# Altium PCB wacky_hat_pcb.PcbDoc
Units mm, origin at the board's own origin, x right, y up, seen from the top; angles counter-clockwise.
Board outline 64 x 85 mm, 4 copper layers (Top Side, Ground Plane, Power Plane, Bottom Side), stack 0.844 mm thick; 87 components, 73 nets, 324 pads, 67 vias.
Unrouted connection lines stored in the file: 66.
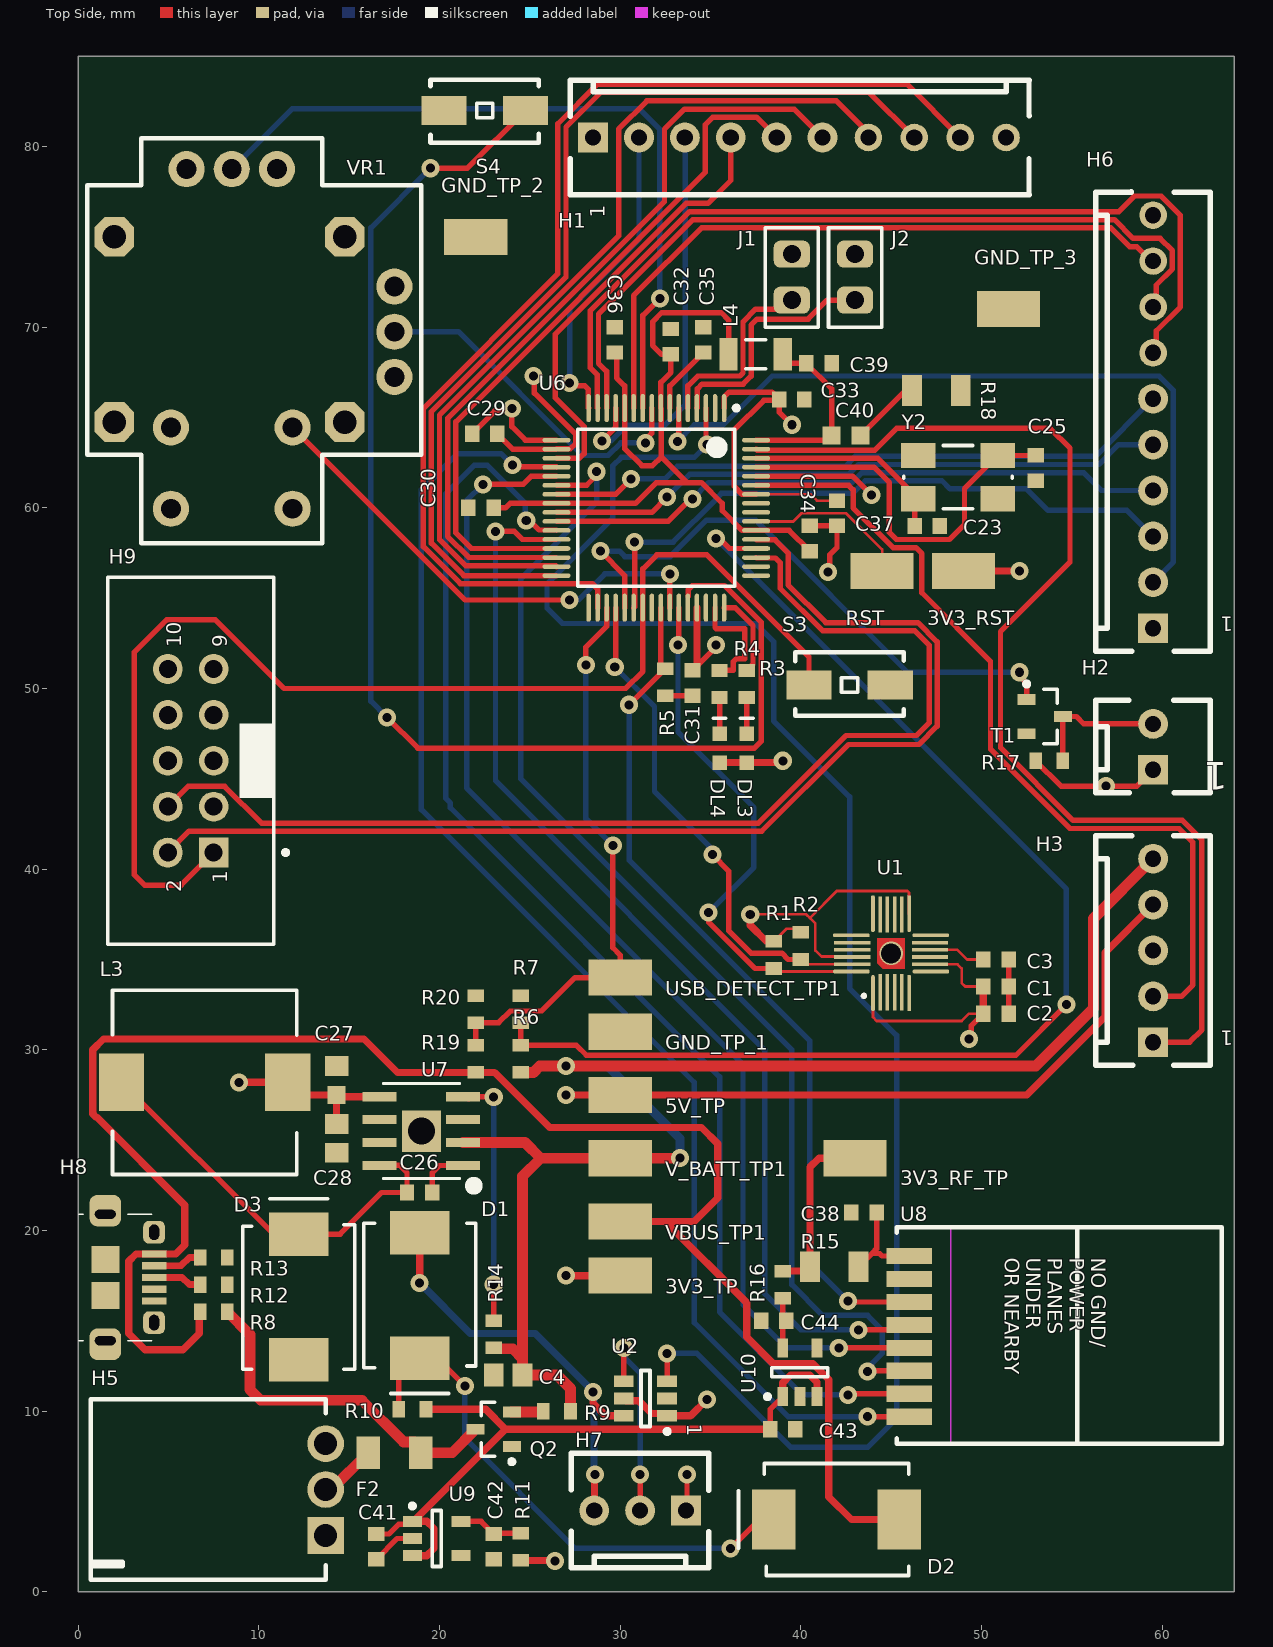
[diagram p0: Top Side view]
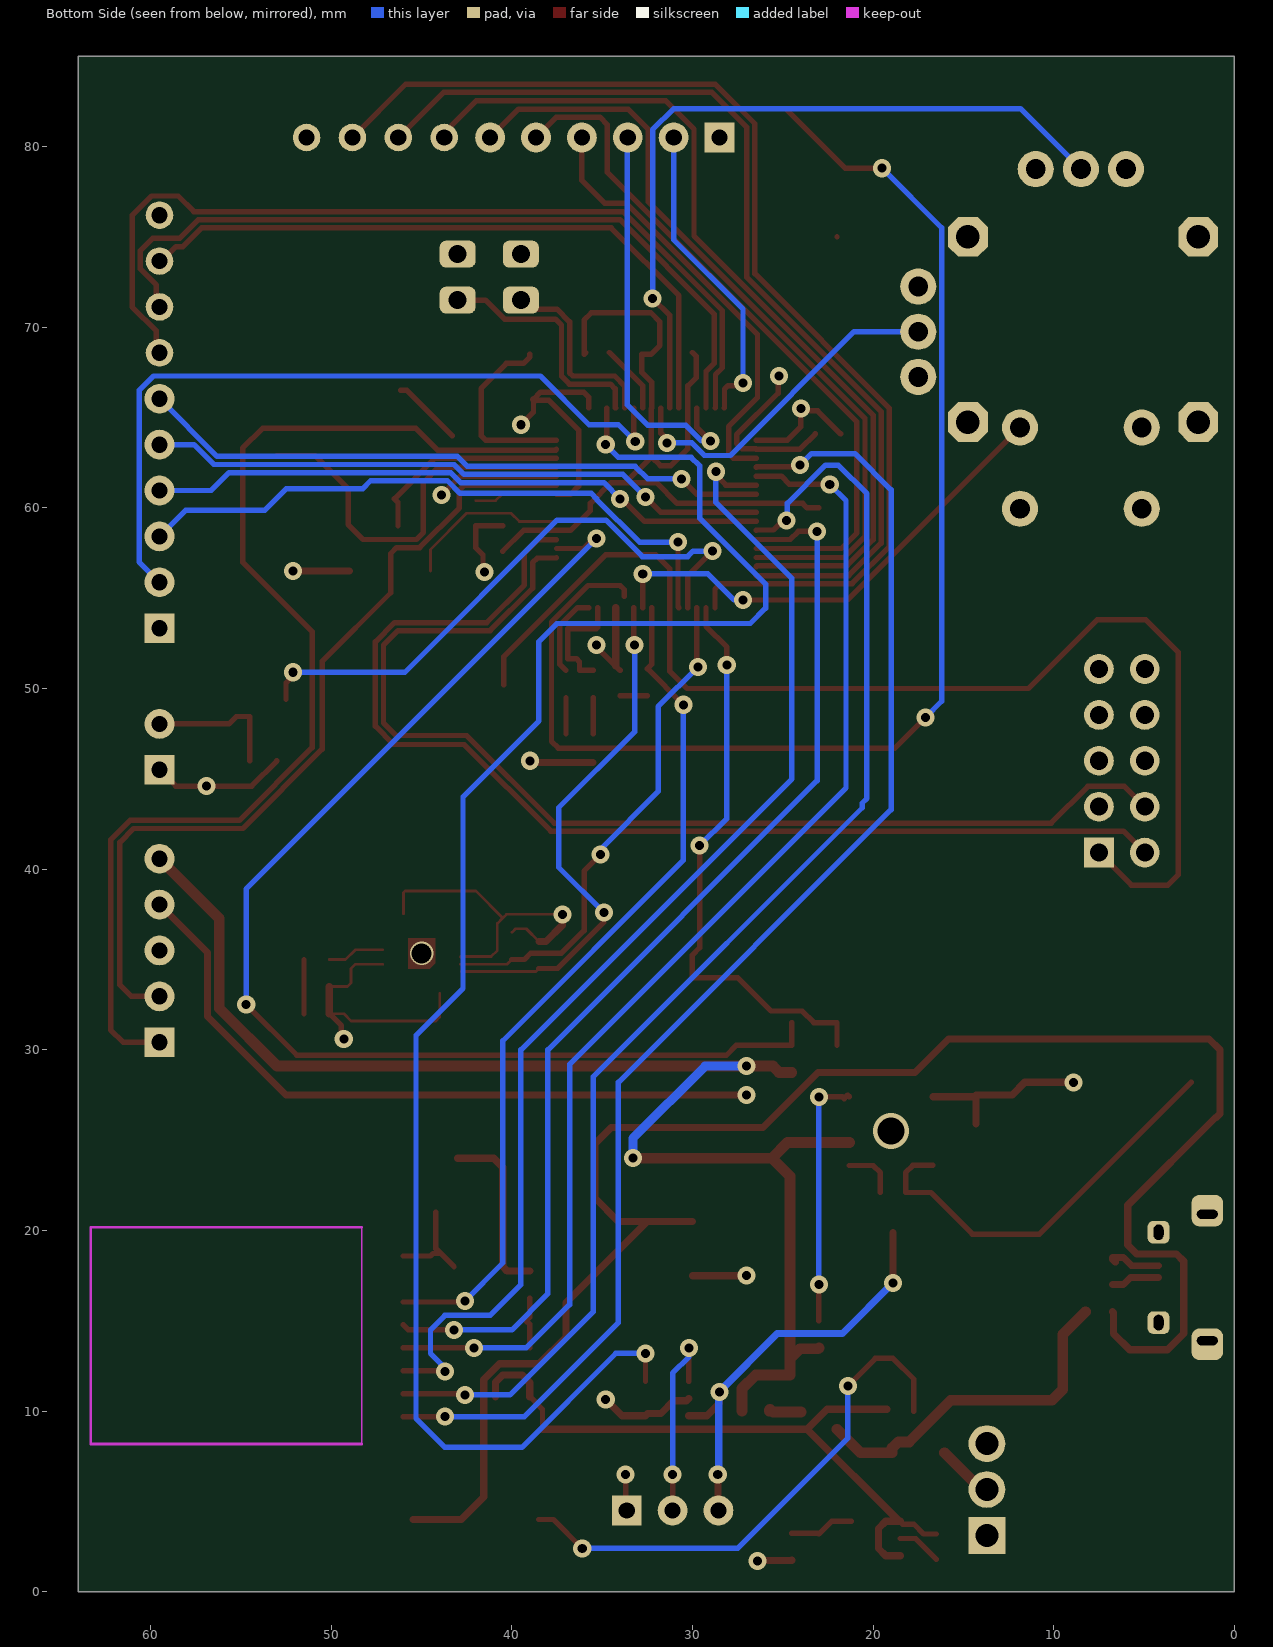
[diagram p1: Bottom Side view, seen from below]
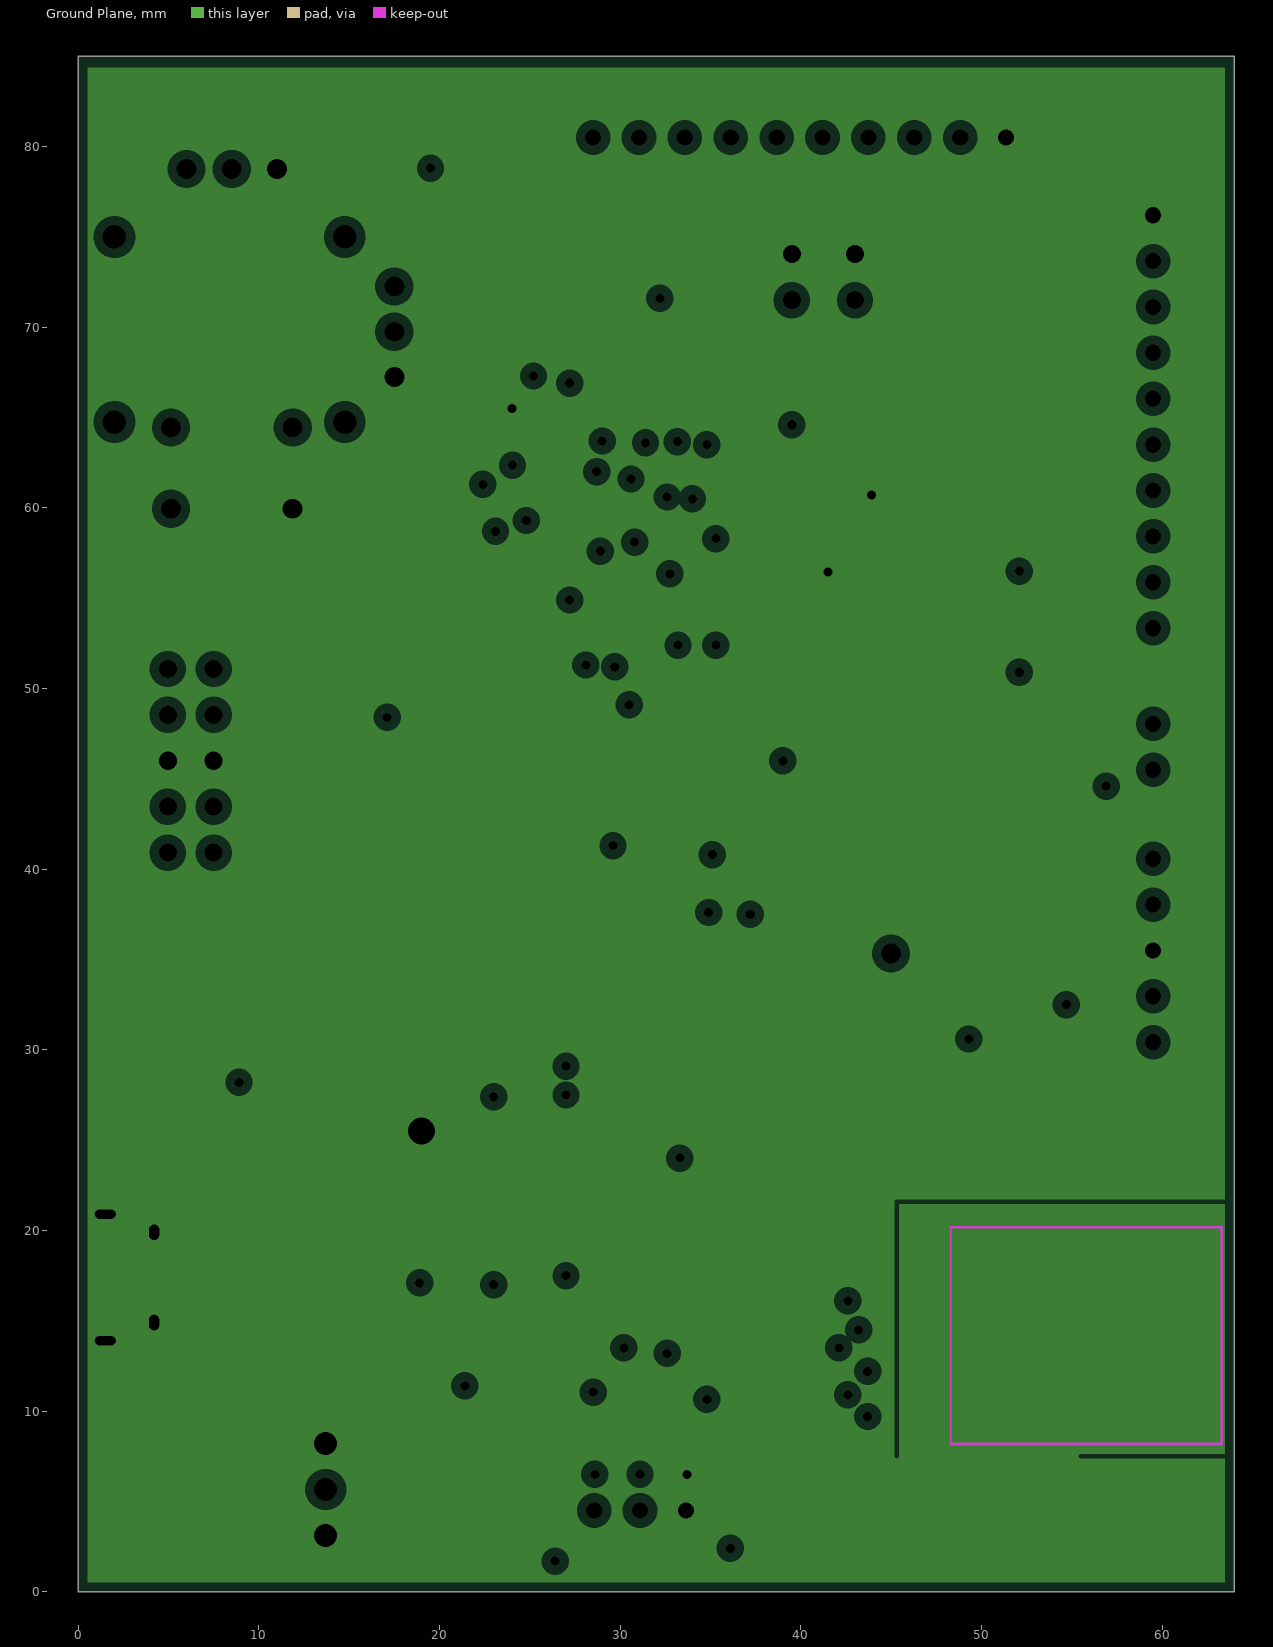
[diagram p2: Ground Plane, clearances drawn from the general rule]
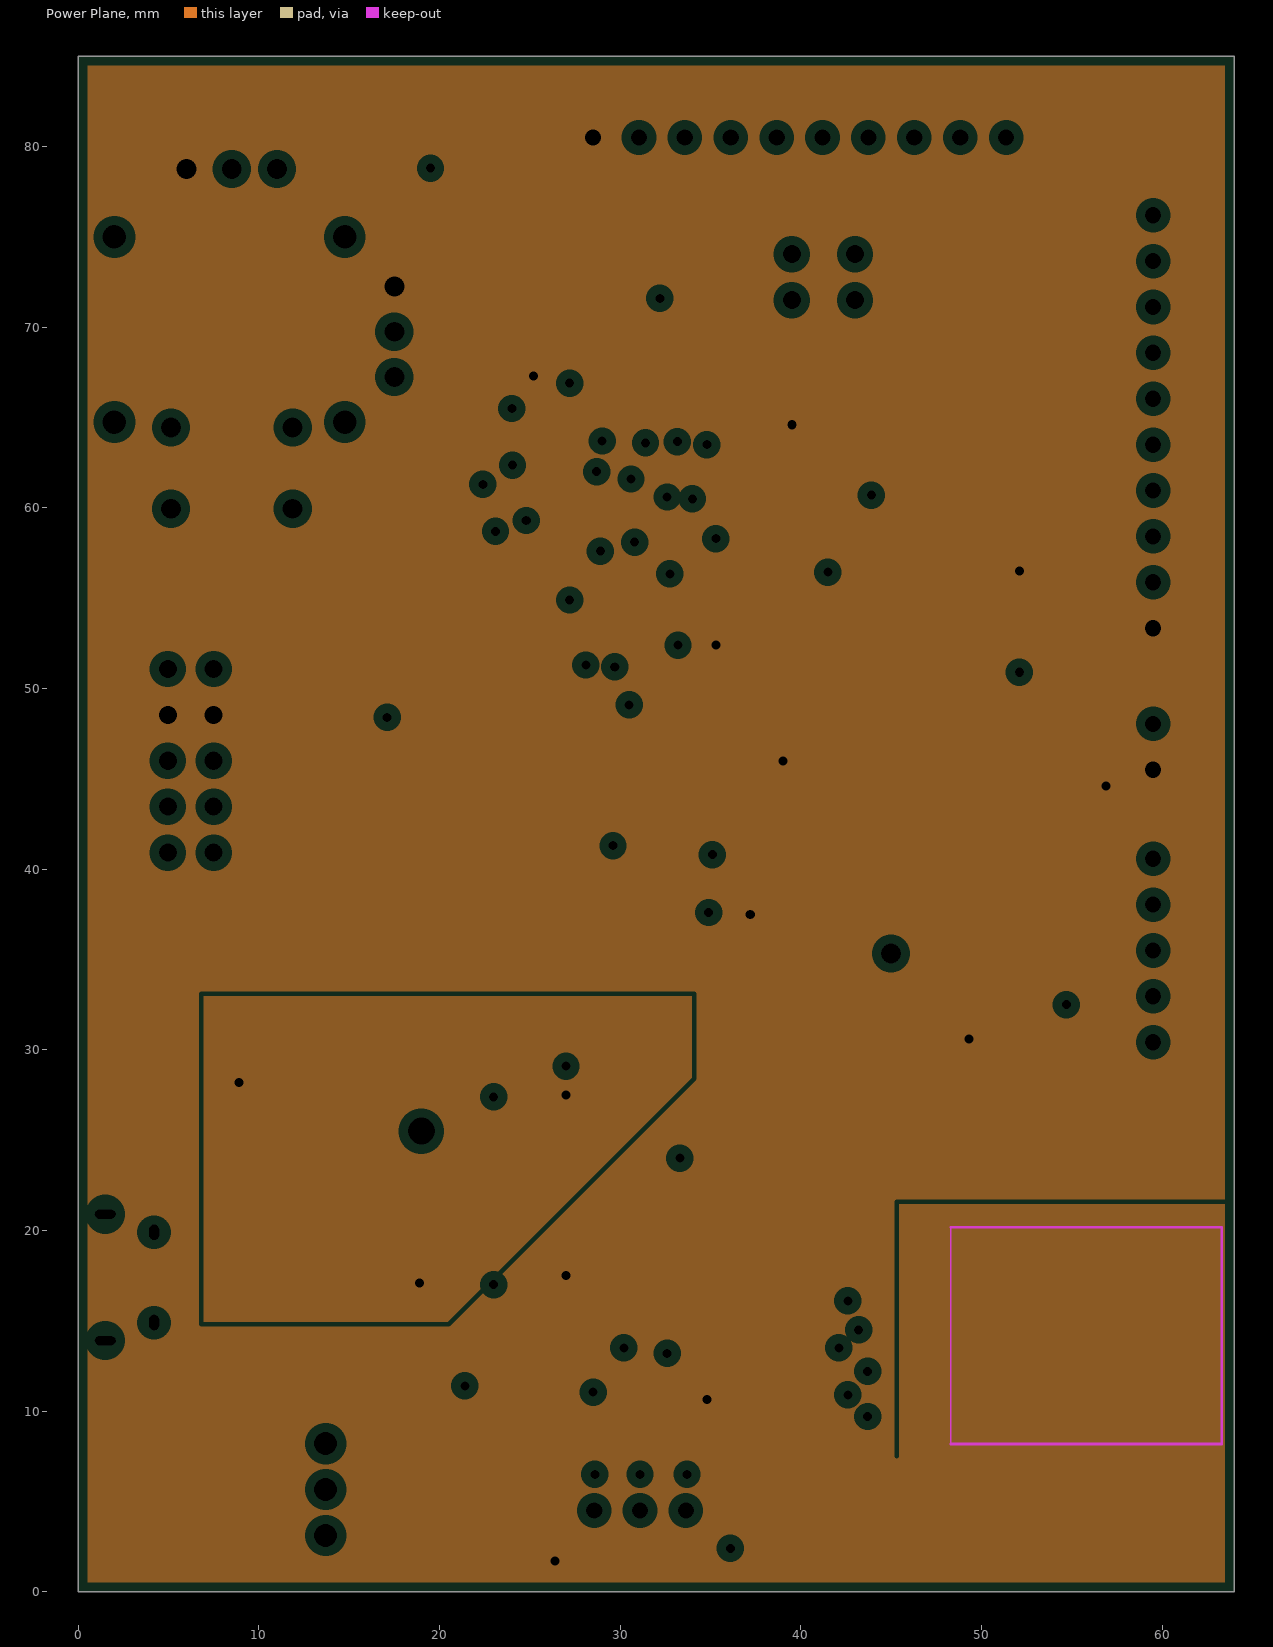
[diagram p3: Power Plane, clearances drawn from the general rule]

## Layer stack, top to bottom
Top Solder: solder mask 0.0102, Solder Resist, Dk 3.5
Top Side: signal copper 0.0356
Dielectric 1: core 0.32, FR-4, Dk 4.8
Ground Plane: plane copper 0.036, net GND
Dielectric 3: prepreg 0.127, Dk 4.2
Power Plane: plane copper 0.036, net (Multiple Nets)
Dielectric 4: core 0.254, Dk 4.2
Bottom Side: signal copper 0.0356
Bottom Solder: solder mask 0.0102, Solder Resist, Dk 3.5

## Board outline
0,85 64,85 64,0 0,0 0,85

## Design rules (kind name [scope] priority, off if disabled: settings)
BoardOutlineClearance [All] p1: gap=0.5 ignorepadtopadclearanceinfootprint=FALSE
Clearance Min_Clearance_Circuit_Labs [All] p1: gap=0.15 ignorepadtopadclearanceinfootprint=FALSE except(0: Arc-Hole Track-Hole SMDPad-Hole THPad-Hole Via-Hole Fill-Hole Poly-Hole Region-Hole Text-Hole)
DiffPairsRouting [All] p1: maxlimit=0.254 minlimit=0.254 mostfreqgap=0.254 toplayer_minwidth=0.381 toplayer_maxwidth=0.381 toplayer_prefwidth=0.381 bottomlayer_minwidth=0.381 bottomlayer_maxwidth=0.381 bottomlayer_prefwidth=0.381 maxuncoupledlength=12.7
FanoutControl Fanout_BGA [IsBGA] p1 off: bgadir=Out bgaviamode=Centered fanoutstyle=Auto fanoutdirection=Alternating viagrid=0.025 // Fanout_BGA (Default Rule)
HoleSize [All] p1: absolutevalues=TRUE maxlimit=10 minlimit=0.3 maxpercent=80.000 minpercent=20.000
MinimumAnnularRing [All] p1: minimumring=0.1
MinimumSolderMaskSliver [All] p1: minsoldermaskwidth=0.1
NetAntennae [All] p1: netantennaetolerance=1
PasteMaskExpansion [All] p1 off: expansion=0.2
PlaneClearance [All] p1: clearance=0.508
PlaneConnect [All] p1: planeconnectstyle=Relief reliefexpansion=0.508 reliefentries=4 reliefconductorwidth=0.254 reliefairgap=0.254
PolygonConnect [All] p1: connectstyle=Relief reliefconductorwidth=0.254 reliefentries=4 polygonreliefangle="90 Angle" airgapwidth=0.254
RoutingVias [All] p1: holewidth=0.5 width=1 viastyle="Through Hole" minholewidth=0.3 minwidth=0.6 maxholewidth=1 maxwidth=2
SMDNeckDown [All] p1 off: percent=50.000
SMDToCorner [All] p1: distance=98425
SMDToPlane [All] p1: distance=1968504
SilkToSolderMaskClearance SilkscreenOverComponentPads [IsPad] p1: minsilkscreentomaskgap=0.254 clearancetoexposedcopper=TRUE
SolderMaskExpansion [All] p1: expansion=0.102
ViasUnderSMD [All] p1: allowed=FALSE
Width "Power Rail width" [InNetClass('Power Rails')] p1: maxlimit=0.4 minlimit=0.15 preferedwidth=0.4 bottomlayer_minwidth=0.4 minimp=50.000000 maximp=50.000000 favimp=50.000000
Width "V_BAT width" [InNetClass('Battery power rails')] p2: maxlimit=0.6 minlimit=0.5 preferedwidth=0.6 toplayer_minwidth=0.6 bottomlayer_prefwidth=0.5 minimp=50.000000 maximp=50.000000 favimp=50.000000
Width [All] p3: maxlimit=2 minlimit=0.15 preferedwidth=0.3
21 further rules are at their usual default settings.

## Classes and differential pairs
differential pair DRes: +DRes_P -DRes_N
differential pair D: +D_P -D_N

## Components (designator, comment, footprint, x,y, rotation, side; value= is the part's Value field where it differs from the comment)
3V3_RF_TP "TP" TP_1206 43,24 r180 top
3V3_RST "TP" TP_1206 49,56.5 r0 top
3V3_TP "TP" TP_1206 30,17.5 r180 top
5V_TP "TP" TP_1206 30,27.5 r180 top
C1 "10nF" CAPC1608L 50.8,33.5 r180 top
C2 "100nF" CAPC1608L 50.8,32 r180 top
C3 "100nF" CAPC1608L 50.8,35 r0 top
C4 "10uF" CAPC2012L#1 23.8,12 r0 top
C23 "27pF" CAPC1608L 47,59 r180 top
C25 "27pF" CAPC1608L 53,62.2 r90 top
C26 "100nF" CAPC1608L 18.9,22.1 r180 top
C27 "33uF" CAPC2012L#2 14.3,28.3 r270 top
C28 "33uF" CAPC2012L#1 14.3,25.1 r90 top
C29 "100nF" CAPC1608L 22.5,64.1 r0 top
C30 "100nF" CAPC1608L 22.3,60 r180 top
C31 "100nF" CAPC1608L 34,50.3 r90 top
C32 "100nF" CAPC1608L 32.8,69.2 r90 top
C33 "100nF" CAPC1608L 39.5,66 r180 top
C34 "100nF" CAPC1608L 40.5,58.3 r90 top
C35 "100nF" CAPC1608L 34.6,69.3 r270 top
C36 "100nF" CAPC1608L 29.7,69.3 r90 top
C37 "100nF" CAPC1608L 42,59.7 r90 top
C38 "10uF" CAPC1608L 43.5,21 r0 top
C39 "100nF" CAPC1608L 41,68 r180 top
C40 "4.7uF" CAPC1608N 42.5,64 r180 top
C41 "1uF" CAPC1608L 16.5,2.5 r90 top
C42 "1uF" CAPC1608L 23,2.5 r90 top
C43 "1uF" CAPC1608L 39,9 r180 top
C44 "1uF" CAPC1608L 38.5,15 r0 top
D1 "VS-30BQ015-M3/9AT" SMC 18.9,16.4 r270 top
D2 "VS-30BQ015-M3/9AT" SMC 41.975,4 r180 top
D3 "VS-30BQ015-M3/9AT" SMC 12.2,16.325 r90 top
DL3 "Yellow" WL-SMCW0603 37,47.5 r270 top
DL4 "Bright Green" WL-SMCW0603 35.5,47.5 r270 top
F2 "5A" RESC3216N 17.5,7.7 r0 top
GND_TP_1 "TP" TP_1206 30,31 r180 top
GND_TP_2 "TP" TP_1206 22,75 r180 top
GND_TP_3 "TP" TP_1206 51.5,71 r180 top
H1 "10 Pin Molex KK Hdr" MOLEX_KK_10_HDR 28.5,80.5 r0 top
H2 "2 Pin Molex KK HDR" MOLEX_KK_2_HDR 59.5,45.5 r90 top
H3 "5 Pin Molex KK Hdr" MOLEX_KK_5_HDR 59.5,30.42 r90 top
H5 "Battery_HEADER_3pin" BATT_HEADER_3POS 13.7,5.66 r90 top
H6 "10 Pin Molex KK Hdr" MOLEX_KK_10_HDR 59.5,53.34 r90 top
H7 "3 Pin Molex KK Hdr" MOLEX_KK_3_HDR 33.64,4.5 r180 top
H8 "JS_USB_MICRO_B" FCI_USB_10118194-0001LF 0.05,17.4 r270 top
H9 "Header 5X2 Vert" IDC2.54-V10D 6.23,46 r90 top
J1 "100Mil Jumper" JMP2.54 39.5,74.044 r270 top
J2 "100Mil Jumper" JMP2.54 43,74.044 r270 top
L3 "IND 5.2UH 6A" INDUCTOR5u2 7,28.2 r0 top
L4 "1A max, Idc 0.3R," INDC3216L 37.5,68.5 r180 top
Q2 "SSM3J328R,LF" SOT23_L 23,9 r180 top
R1 "1K5" RESC1608L 38.5,35.25 r90 top
R2 "1K5" RESC1608L 40,35.75 r90 top
R3 "2K2" RESC1608L 37,50.25 r90 top
R4 "2K2" RESC1608L 35.5,50.25 r90 top
R5 "10K" RESC1608L 32.5,50.35 r90 top
R6 "100K" RESC1608L 24.5,29.5 r270 top
R7 "56K" RESC1608L 24.5,32.25 r270 top
R8 "0R" RESC1608L 7.5,15.5 r180 top
R9 "0R" RESC1608L 26.5,10 r0 top
R10 "0R" RESC1608L 18.5,10.1 r0 top
R11 "0R" RESC1608L 24.5,2.5 r270 top
R12 "27R" RESC1608L 7.5,17 r0 top
R13 "27R" RESC1608L 7.5,18.5 r0 top
R14 "100K" RESC1608L 23,14.25 r270 top
R15 "1R" RESC3216L 41.85,18 r0 top
R16 "0R" RESC1608L 39,17 r90 top
R17 "1K" RESC1608L 53.75,46 r180 top
R18 "1R" RESC3216L 47.5,66.5 r180 top
R19 "27K" RESC1608L 22,29.5 r270 top
R20 "47K" RESC1608L 22,32.25 r270 top
RST "TP" TP_1206 44.5,56.5 r0 top
S3 "EVQPNF05M" EVQPNF05M 42.7,50.2 r0 top
S4 "EVQPNF05M" EVQPNF05M 22.5,82 r180 top
T1 "BSH105,215" SOT23_L 53.5,48.45 r0 top
U1 "MPU-9250" QUAD24 43.993,33.985 r90 top locked
U2 "SN74LVC1T45" SOT23-6_N 31.4,10.7 r180 top
U6 "ATSAM4S8BA-ANR" LQFP64_L 32,60 r270 top locked
U7 "ADP2302ARDZ-5.0 BUCK" RD_8_1 19,25.5 r180 top locked value=Value
U8 "nRF24 SMD" NRF24 45.3,20.186 r270 top
U9 "CAT6219-330TDGT3" SOT95P280X145-5N 19.85,2.95 r0 top
U10 "CAT6219-330TDGT3" SOT95P280X145-5N 39.95,12.15 r90 top
USB_DETECT_TP1 "TP" TP_1206 30,34 r180 top
V_BATT_TP1 "TP" TP_1206 30,24 r180 top
VBUS_TP1 "TP" TP_1206 30,20.5 r180 top
VR1 "Joystick 10k with Sw" Joystick_Sw 8.5,78.75 r90 top
Y2 "12MHz" 6.0X3.5-4 48.7,61.7 r0 top

## Footprints (in the part's own frame and the unit in brackets; to place one, negate y for a bottom-side part, rotate by r counter-clockwise, add the part's x,y. Pads: shape width x height; smd on the part's side, far side on the other; paste and mask are expansions set on the pad)
6.0X3.5-4 [mm] "4 SMD 6.0X3.5 mm No Lead Crystal"
  rect 1.9x1.4 smd: 1(-2.2,-1.2) 2(2.2,-1.2) 3(2.2,1.2) 4(-2.2,1.2)
  silkscreen extent -3,-1.75 3,1.75, body extent -3,-1.75 3,1.75, height 1.2
BATT_HEADER_3POS [mil]
  rect 80x80 hole 50: 1(-100,0)
  round 80 hole 50: 2(0,0) 3(100,0)
  silkscreen extent -197,0 197,512
CAPC1608L [mm] "Chip Capacitor, Body 1.6x0.8mm, IPC High Density"
  rect 0.8x0.9 smd: 1(-0.7,0) 2(0.7,0)
  body extent -0.87,-0.48 0.87,0.48, height 0.85
CAPC1608N [mm] "Chip Capacitor, Body 1.6x0.8mm, IPC Medium Density"
  rect 1x1 smd: 1(-0.8,0) 2(0.8,0)
  body extent -0.87,-0.48 0.87,0.48, height 0.85
CAPC2012L#1 [mm] "Chip Capacitor, Body 2.0x1.3mm, IPC High Density"
  rect 1.1x1.3 smd: 1(-0.8,0) 2(0.8,0)
  body extent -1.1,-0.72 1.1,0.72, height 1.1
CAPC2012L#2 [mm] "Chip Capacitor, Body 2.0x1.3mm, IPC High Density"
  rect 1.1x1.3 smd: 1(-0.8,0)
  rect 1x1 smd: 2(0.8,0)
  body extent -1.1,-0.72 1.1,0.72, height 1.1
EVQPNF05M [mm] "Panansonic light touch SMD push button switch"
  rect 2.5x1.6 smd: 1(-2.25,0) 2(2.25,0)
  silkscreen extent -3,-1.7 3,1.8, body extent -3,-1.7 3,1.8, height 5
FCI_USB_10118194-0001LF [mm] "Micro USB B Type Receptacle"
  rect 0.4x1.35 smd mask+0.07: 1(-1.3,4.15) 2(-0.65,4.15) 3(0,4.15) 4(0.65,4.15) 5(1.3,4.15)
  rrect50% 1.75x1.75 hole 0.5 slot 1.15 at 90 deg copper offset -0.2,0 paste+0 mask+0.1: 6(-3.5,1.45)
  rrect50% 1.25x1.2 hole 0.55 slot 0.85 at 0 deg: 6(-2.5,4.15) 6(2.5,4.15)
  rect 1.5x1.55 smd: 6(-1,1.45) 6(1,1.45)
  rrect50% 1.75x1.75 hole 0.5 slot 1.15 at 90 deg copper offset 0.2,0 paste+0 mask+0.1: 6(3.5,1.45)
  silkscreen extent -3.5,0 3.5,4
IDC2.54-V10D [mm] "Connector; IDC, Low Profile Male Header, Thru-Hole; 10 Position; Vertical; Pitch 2.54 mm; Body 20.32 x 9.2 x 9.45 mm (LxWxH)"
  rect 1.65x1.65 hole 1: 1(-5.08,-1.27)
  round 1.65 hole 1: 2(-5.08,1.27) 3(-2.54,-1.27) 4(-2.54,1.27) 5(0,-1.27) 6(0,1.27) 7(2.54,-1.27) 8(2.54,1.27) 9(5.08,-1.27) 10(5.08,1.27)
  silkscreen extent -10.16,-5.38 10.16,4.6, body extent -10.16,-4.6 10.16,4.6, height 9.45
INDC3216L [mm] "Chip Inductor, Body 3.2x1.6mm, IPC High Density"
  rect 1x1.8 smd: 1(-1.5,0) 2(1.5,0)
  silkscreen extent -0.55,-0.8 0.55,0.8, body extent -1.75,-0.95 1.75,0.95, height 1.9
INDUCTOR5u2 [mm]
  rect 2.5x3.2 smd: 1(-4.6,0) 2(4.6,0)
  silkscreen extent -5.1,-5.1 5.1,5.1
JMP2.54 [mm] "Jumper Change over 2.54mm"
  rrect50% 1.5x2 hole 1: 1(0,0) 2(2.544,0)
  silkscreen extent -1.47,-1.47 4.05,1.47, body extent -1.43,-1.43 4.05,1.43, height 8.45
Joystick_Sw [mm]
  round 2 hole 1.1: 1(0,2.5) 2(0,0) 3(0,-2.5) 4(-6.5,-9) 5(-9,-9) 6(-11.5,-9) 7(-14.3,-3.37) 8(-18.8,-3.37) 9(-18.8,3.37) 10(-14.3,3.37)
  oct 2.2x2.2 hole 1.3: 11(-14,-6.25) 12(-3.75,-6.25) 13(-14,6.5) 14(-3.75,6.5)
  silkscreen extent -20.7,-10.5 1.7,8
LQFP64_L [mm] "Thin QFP, 64-Leads, Body 10x10mm, Pitch 0.5mm, IPC High Density"
  oval 1.55x0.25 smd mask+0.07: 1(-5.525,3.75) 2(-5.525,3.25) 3(-5.525,2.75) 4(-5.525,2.25) 5(-5.525,1.75) 6(-5.525,1.25) 7(-5.525,0.75) 8(-5.525,0.25) 9(-5.525,-0.25) 10(-5.525,-0.75) 11(-5.525,-1.25) 12(-5.525,-1.75) 13(-5.525,-2.25) 14(-5.525,-2.75) 15(-5.525,-3.25) 16(-5.525,-3.75) 33(5.525,-3.75) 34(5.525,-3.25) 35(5.525,-2.75) 36(5.525,-2.25) 37(5.525,-1.75) 38(5.525,-1.25) 39(5.525,-0.75) 40(5.525,-0.25) 41(5.525,0.25) 42(5.525,0.75) 43(5.525,1.25) 44(5.525,1.75) 45(5.525,2.25) 46(5.525,2.75) 47(5.525,3.25) 48(5.525,3.75)
  oval 0.25x1.55 smd mask+0.07: 17(-3.75,-5.525) 18(-3.25,-5.525) 19(-2.75,-5.525) 20(-2.25,-5.525) 21(-1.75,-5.525) 22(-1.25,-5.525) 23(-0.75,-5.525) 24(-0.25,-5.525) 25(0.25,-5.525) 26(0.75,-5.525) 27(1.25,-5.525) 28(1.75,-5.525) 29(2.25,-5.525) 30(2.75,-5.525) 31(3.25,-5.525) 32(3.75,-5.525) 49(3.75,5.525) 50(3.25,5.525) 51(2.75,5.525) 52(2.25,5.525) 53(1.75,5.525) 54(1.25,5.525) 55(0.75,5.525) 56(0.25,5.525) 57(-0.25,5.525) 58(-0.75,5.525) 59(-1.25,5.525) 60(-1.75,5.525) 61(-2.25,5.525) 62(-2.75,5.525) 63(-3.25,5.525) 64(-3.75,5.525)
  silkscreen extent -5.65,-4.35 4.35,4.55, body extent -5,-5 5,5, height 1.6
MOLEX_KK_2_HDR [mil] "MOLEX_KK_2_HDR"
  rect 65x65 hole 35.43: 1(0,0)
  round 65 hole 35.43: 2(100,0)
  silkscreen extent -50,-125 152,125, body extent -44,-121 146,119, height 630
MOLEX_KK_3_HDR [mil] "MOLEX_KK_3_HDR"
  rect 65x65 hole 35.43: 1(0,0)
  round 65 hole 35.43: 2(100,0) 3(200,0)
  silkscreen extent -50,-125 250,125, body extent -44,-120 244,119, height 630
MOLEX_KK_5_HDR [mil] "MOLEX_KK_5_HDR"
  rect 65x65 hole 35.43: 1(0,0)
  round 65 hole 35.43: 2(100,0) 3(200,0) 4(300,0) 5(400,0)
  silkscreen extent -50,-125 450,125, body extent -44,-118 444,118, height 630
MOLEX_KK_10_HDR [mil] "MOLEX_KK_10_HDR"
  rect 65x65 hole 35.43: 1(0,0)
  round 65 hole 35.43: 2(100,0) 3(200,0) 4(300,0) 5(400,0) 6(500,0)
  round 60 hole 35.43: 7(600,0) 8(700,0) 9(800,0) 10(900,0)
  silkscreen extent -50,-125 951,125, body extent -44,-120 944,120, height 630
NRF24 [mm]
  rect 0.9x2.5 smd: 1(1.6,0.7) 2(2.871,0.7) 3(4.143,0.7) 4(5.414,0.7) 5(6.686,0.7) 6(7.957,0.7) 7(9.229,0.7) 8(10.5,0.7)
  Keep-Out Layer lines w0.1: 12,3 0,3
  Keep-Out Layer lines w0.15: 12,3 12,18 0,18 0,3
  silkscreen extent 0,0 12,18
QUAD24 [mm]
  oval 2x0.2 smd paste+0.02 mask+0.015: 1(-0.85,0)
  rect 2x0.2 smd paste+0.02 mask+0.015: 2(-0.8,-0.4) 3(-0.8,-0.8) 4(-0.8,-1.2) 5(-0.8,-1.6) 14(3.5,-1.6) 15(3.5,-1.2) 16(3.5,-0.8) 17(3.5,-0.4)
  rrect50% 2x0.2 smd paste+0.02 mask+0.015: 6(-0.85,-2) 13(3.55,-2) 18(3.55,0)
  rrect50% 0.2x2 smd paste+0.02 mask+0.015: 7(0.35,-3.2) 12(2.35,-3.2) 19(2.35,1.2) 24(0.35,1.2)
  rect 0.2x2 smd paste+0.02 mask+0.015: 8(0.75,-3.15) 9(1.15,-3.15) 10(1.55,-3.15) 11(1.95,-3.15) 20(1.95,1.15) 21(1.55,1.15) 22(1.15,1.15) 23(0.75,1.15)
  Top Side region: 0.5,-1.75 0.5,-0.55 0.8,-0.25 2.2,-0.25 2.2,-1.75
  silkscreen extent -1.05,0.45 -0.95,0.55
RD_8_1 [mil]
  rect 74x20 smd paste+0 mask+0: 1(-91,75) 2(-91,25) 3(-91,-25) 4(-91,-75) 5(91,-75) 6(91,-25) 7(91,25) 8(91,75)
  rect 84.65x90 smd paste-44.5 mask+0: EPAD(0,0)
  silkscreen extent -118,-103 84,123, body extent 0,0 10,10, height 10
RESC1608L [mm] "Chip Resistor, Body 1.6x0.8mm, IPC High Density"
  rect 0.7x0.9 smd: 1(-0.75,0) 2(0.75,0)
  body extent -0.85,-0.48 0.85,0.48, height 0.9
RESC3216L [mm] "Chip Resistor, Body 3.1x1.6mm, IPC High Density"
  rect 1.1x1.7 smd: 1(-1.35,0) 2(1.35,0)
  body extent -1.68,-0.87 1.68,0.87, height 2.54
RESC3216N [mm] "Chip Resistor, Body 3.2x1.6mm, IPC Medium Density"
  rect 1.3x1.8 smd: 1(-1.45,0) 2(1.45,0)
  body extent -1.68,-0.87 1.68,0.87, height 0.71
SMC [mm] "DO-214-AB/SMC; 2 C-Bend Leads; Body 7.9 x 5.9 mm, inc. leads (LxW)"
  rect 2.4x3.3 smd: 1(-3.475,0) 2(3.475,0)
  silkscreen extent -4,-3.1 5.43,3.1
SOT23-6_N [mm]
  rect 1.1x0.65 smd: 1(-1.2,0.95) 2(-1.2,0) 3(-1.2,-0.95) 4(1.2,-0.95) 5(1.2,0) 6(1.2,0.95)
  silkscreen extent -1.33,-1.55 0.25,1.95, body extent -0.9,-1.55 0.9,1.55, height 1.45
SOT23_L [mm] "SOT23, 3-Leads, Body 2.9x1.3mm, Pitch 0.95mm, Lead Span 2.3mm, IPC High Density"
  rect 1x0.6 smd: 1(-1,0.95) 2(-1,-0.95) 3(1,0)
  silkscreen extent -1.13,-1.5 0.7,1.92, body extent -0.7,-1.5 0.7,1.5, height 1.1
SOT95P280X145-5N [mm] "SOT23, 5-Leads, Body 2.90x2.80mm, Pitch 0.95mm, IPC Medium Density"
  rect 1.05x0.6 smd: 1(-1.35,0.95) 2(-1.35,0) 3(-1.35,-0.95) 4(1.35,-0.95) 5(1.35,0.95)
  silkscreen extent -1.47,-1.55 0.25,1.92, body extent -0.87,-1.52 0.87,1.53, height 1.45
TP_1206 [mm] "Test Point Pad"
  rect 3.5x2 smd: 1(0,0)
  body extent -1.62,-0.85 1.63,0.8, height 2
WL-SMCW0603 [mm] "2.4 x 0.8 x 0.7mm LED"
  rect 0.8x0.8 smd: 1(0,0) 2(1.6,0)
  silkscreen extent -0.85,-0.35 -0.85,0.35

## Part data
3V3_RF_TP 3V3_RST 3V3_TP 5V_TP GND_TP_1 GND_TP_2 GND_TP_3 RST USB_DETECT_TP1 V_BATT_TP1 VBUS_TP1: library part TP_1206, "Test-Point 3.3x1.6x2.1mm SMD", Manufacturer="Harwin Inc", Manufacturer Part Number=S1751-46R, Supplier Part Number 1=952-1478-2-ND, Mounting Type="Surface Mount", Storage Location=ProtoPlace, Supplier="ECE Dept", Supplier 1=Digi-Key, Supplier 2=Farnell, Supplier Part Number 2=1826282, Type="PC Test Point"
C1: library part CC_10nF_0603, "CAP CER 10nF X7R +-10% 50V 0603", Code_IPC="1608 [0603]", PackageReference=0603, Storage Location="PCB Assembly WS", Supplier="ECE Dept"
C2 C3 C26 C29 C30 C31 C32 C33 C34 C35 C36 C37 C39: library part CC_100nF_0603, "CAP CER 100nF X7R +-10% 50V 0603", Code_IPC="1608 [0603]", PackageReference=0603, Storage Location="PCB Assembly WS", Supplier="ECE Dept"
C4: library part CC_10uF_16V_0805, "CAP CER 10uF X5R 16V 0805", Manufacturer="Samsung Electro-Mechanics", Manufacturer Part Number=CL21A106KOQNNWE, Max Voltage=16V, Operating Temperature="-55°C ~ 85°C", Package / Case="0805 (2012 Metric)", Ratings=-, Supplier Part Number 1=1276-2894-1-ND, Temperature Coefficient=X5R, Tolerance=±10%, Applications="General Purpose", Category=Capacitors, Code_IPC=2012[0805], ComponentLink1Description=http://www.samsungsem.com/kr/support/product-search/mlcc/CL21A106KOQNNWE.jsp, ComponentLink1URL=http://www.samsungsem.com/kr/support/product-search/mlcc/CL21A106KOQNNWE.jsp, Features=-, Height - Seated (Max)=-, Lead Spacing=-, Lead Style=-, Mounting Type="Surface Mount, MLCC", Note="Footprint corresponds to dimensions for bulk cassette packaging. This case size has tightened tolerances.", Notification="Current market demand for these product types have resulted in fluctuating and extending lead times. Lead times may differ.", PackageReference=0805, Packaging="Cut Tape (CT)", Part Status=Active, Pricing 1="1=0.35, 10=0.25, 100=0.1178, 500=0.08254, 1000=0.06831 (NZD)", RoHS="RoHS Compliant", Size / Dimension="0.079\" L x 0.049\" W (2.00mm x 1.25mm)", Stock 1=20000, Supplier 1=Digi-Key, Thickness (Max)="0.055\" (1.40mm)", Voltage - Rated=16V
C23 C25: library part CC_27pF_0603, "CAP CER 27pF NPO/COG +-5% 50V 0603", Code_IPC="1608 [0603]", PackageReference=0603, Storage Location="PCB Assembly WS", Supplier="ECE Dept"
C27 C28: library part CC_33uF_6V3_0805, "CAP CER 33uF X5R 6V3 0805", Manufacturer="TDK Corporation", Manufacturer Part Number=C2012X5R0J336M125AC, Operating Temperature="-55°C ~ 85°C", Package / Case="0805 (2012 Metric)", Ratings=-, Supplier Part Number 1=445-5986-1-ND, Temperature Coefficient=X5R, Tolerance=±20%, Voltage - Rated=6.3V, Applications="General Purpose", Category=Capacitors, ComponentLink1Description=https://product.tdk.com/info/en/catalog/datasheets/mlcc_commercial_general_en.pdf, ComponentLink1URL=https://product.tdk.com/info/en/catalog/datasheets/mlcc_commercial_general_en.pdf, Failure Rate=-, Features="Low ESL", Height - Seated (Max)=-, Lead Spacing=-, Lead Style=-, Mounting Type="Surface Mount, MLCC", Notification="Current market demand for these product types have resulted in fluctuating and extending lead times. Lead times may differ.", Packaging="Cut Tape (CT)", Part Status=Active, Pricing 1="1=1.65, 10=1.262, 100=0.9023, 500=0.6985, 1000=0.60149 (NZD)", RoHS="RoHS Compliant", Size / Dimension="0.079\" L x 0.049\" W (2.00mm x 1.25mm)", Stock 1=20000, Supplier 1=Digi-Key, Thickness (Max)="0.057\" (1.45mm)"
C38: library part CC_10uF_0603, "CAP CER 10UF X5R +-20% 6V3 0603", Voltage - Rated=6.3V, Storage Location="PCB Assembly WS", Supplier="ECE Dept"
C40: library part CC_4.7uF_0603, "CAP CER 4.7uF X5R +-20%  10V 0603", Max Voltage=10V, Code_IPC=2012[0805], Note="Footprint corresponds to dimensions for bulk cassette packaging. This case size has tightened tolerances.", PackageReference=0805, Storage Location="PCB Assembly WS", Supplier="ECE Dept"
C41 C42 C43 C44: library part CC_1uF_0603, "CAP CER 1uF Y5V -20% +80% 16V 0603", Max Voltage=16V, Code_IPC="1608 [0603]", PackageReference=0603, Storage Location="PCB Assembly WS", Supplier="ECE Dept"
D1 D2 D3: library part DS_VS-30BQ015-M3, "DIODE, SCHOTTKY, 3A, 15V, DO-214AB / SMC", Average Rectified Current=3A, Forward Voltage=350mV, Manufacturer="Vishay Semiconductors", Max Forward Surge Current (Ifsm)=650A, Max Reverse Voltage (DC)=15V, Peak Reverse Current=4mA, Supplier Part Number=VS-30BQ015-M3/9AT-ND, Supplier Part Number 1=VS-30BQ015-M3/9ATGIDKR-ND, ComponentLink1Description=https://datasheet.ciiva.com/36181/vs-30bq015-m3-9at-36181258.pdf, ComponentLink1URL=https://datasheet.ciiva.com/36181/vs-30bq015-m3-9at-36181258.pdf, Manufacturer Part Number=VS-30BQ015-M3/9AT, Supplier=Digi-Key, Supplier 1=Digi-Key, Supplier 2=Element14, Supplier Part Number 2=2628288
DL3: library part DL_150060YS75000, "LED Yellow 120mcd 0603 SMD", Forward Current If=30, Forward Voltage=2, Manufacturer="WURTH ELEKTRONIK", Manufacturer Part Number=150060YS75000, Supplier Part Number 1=2322074, LED Colour=Yellow, LED Mounting=SMD, Lens Shape=Rectangular, Luminous Intensity=120, Storage Location="PCB Assembly WS", Supplier="ECE Dept", Supplier 1=Farnell, Viewing Angle=140°, Wavelength Typ=590
DL4: library part DL_150060VS75000, "LED Bright Green 40mcd 0603 SMD", Forward Current If=30, Forward Voltage=2, Manufacturer="WURTH ELEKTRONIK", Manufacturer Part Number=150060VS75000, Supplier Part Number 1=2322073, LED Colour="Bright Green", LED Mounting=SMD, Luminous Intensity=40, Storage Location="PCB Assembly WS", Supplier="ECE Dept", Supplier 1=Farnell, Viewing Angle=140°, Wavelength Typ=570
F2: library part FS_Fuse_5.0A, "Fuse 5.0A Fast Acting 1206 SMD", Case/Package=1206, Case Code (Metric)=3216, DC Cold Resistance=19mR, Manufacturer="Bel TRP", Manufacturer Part Number=C1F5, Max Operating Temperature=125°C, Min Operating Temperature=-55°C, Supplier Part Number 1=507-1886-1-ND, Voltage Rating=125V, Voltage Rating (DC)=63V, Approvals=CE,cURus, Case Code (Imperial)=1206, ComponentLink1Description=http://www.farnell.com/datasheets/2571625.pdf, ComponentLink1URL=http://www.farnell.com/datasheets/2571625.pdf, ComponentLink2Description=http://belfuse.com/pdfs/C1F.pdf, ComponentLink2URL=http://belfuse.com/pdfs/C1F.pdf, ComponentLink3Description=http://www.mouser.com/ds/2/643/C1F-594910.pdf, ComponentLink3URL=http://www.mouser.com/ds/2/643/C1F-594910.pdf, ComponentLink4Description=https://belfuse.com/resources/StewartConnector/C1F.pdf, ComponentLink4URL=https://belfuse.com/resources/StewartConnector/C1F.pdf, Contact Plating=Nickel,Tin, Current Rating=5A, Fuse Type="Board Mount (Cartridge Style Excluded)", Length=0.126inch, Mount="Surface Mount", Number of Pins=2, Packaging="Tape and Reel", Pricing 1="1=0.32, 5=0.312, 10=0.298, 50=0.2662, 100=0.2479, 250=0.22032, 500=0.1836, 1000=0.17442 (USD)", Stock 1=725, Supplier 1=Digi-Key, Supplier 2=Element14, Supplier Part Number 2=2848595, Voltage Rating (AC)=125V, Width=0.062inch
H1 H6: library part JA_MOLEX_KK_10POS, "CONN HEADER 10POS 2.54mm VERT_ Thru Hole", Supplier Part Number 1=1756828, Storage Location="ECE Dept Store", Supplier="ECE Dept", Supplier 1=Farnell
H2: library part JA_MOLEX_KK_2POS, "CONN HEADER 2POS 2.54mm VERT_Thru Hole", Supplier Part Number 1=1462926, Storage Location="ECE Dept Store", Supplier="ECE Dept", Supplier 1=Farnell
H3: library part JA_MOLEX_KK_5POS, "CONN HEADER 5POS 2.54mm VERT_Thru Hole", Manufacturer=Molex, Manufacturer PN=22-23-2051, Supplier Part Number 1=9731679, Storage Location="ECE Dept Store", Supplier="ECE Dept", Supplier 1=Farnell
H5: "3Pin Header 2.54mm spacing"
H7: library part JA_MOLEX_KK_3POS, "CONN HEADER 3POS 2.54mm VERT_Thru Hole", Manufacturer=Molex, Manufacturer PN=22-23-2031, Supplier Part Number 1=9731156, Storage Location="ECE Dept Store", Supplier="ECE Dept", Supplier 1=Farnell
H8: library part JS_USB_MICRO_B_SMT, "CONN USB MICRO B RECPT SMT R/A", Manufacturer=FCI, Manufacturer Part Number=10118194-0001LF, Supplier Part Number 1=609-4618-1-ND, Features="Shielded, Solder Retention", Gender=Receptacle, Mounting Type="Surface Mount, Right Angle, Horizontal", Number of Contacts=5, Specifications="USB 2.0", Supplier 1=Digi-Key
H9: library part JA_HDR_IDC_5X2_VERT, "IDC Header, 2,54mm, 10-Pin, Vert", Supplier Part Number 1=1096985, Storage Location="ECE Dept Store", Supplier="ECE Dept", Supplier 1=Farnell
J1 J2: library part TP_JUMPER, "2.54mm Jumper Thru Hole", Supplier Part Number 1=1097975, No. of Positions=2, No. of Rows=1, Pitch Spacing=2.54, Storage Location="ECE$ Store", Supplier="ECE Dept", Supplier 1=Farnell
L3: library part CDRH104RNP-5R2NC, "FIXED IND 5.2UH 6A 22 MOHM SMD", Current - Saturation=5.6A, DC Resistance (DCR)="22 mOhm Max", Frequency - Self Resonant=-, Manufacturer="Sumida America Components Inc.", Operating Temperature="-40°C ~ 100°C", Package / Case=Nonstandard, Supplier Part Number 1=308-2280-1-ND, Tolerance=±30%, Category="Inductors, Coils, Chokes", ComponentLink1Description=http://products.sumida.com/products/pdf/CDRH104R.pdf, ComponentLink1URL=http://products.sumida.com/products/pdf/CDRH104R.pdf, Height - Seated (Max)="0.157\" (4.00mm)", Manufacturer Part Number=CDRH104RNP-5R2NC, Material - Core=Ferrite, Mounting Type="Surface Mount", Packaging="Cut Tape (CT)", Part Status=Active, Pricing 1="1=2.9, 10=2.678, 100=1.8743, 500=1.5173 (NZD)", Q @ Freq=-, Ratings=-, RoHS="RoHS Compliant", Shielding=Shielded, Size / Dimension="0.402\" L x 0.394\" W (10.20mm x 10.00mm)", Stock 1=3849, Supplier 1=Digi-Key, Supplier Device Package=-, Type=-
L4: library part IN_Ferrite-Bead, "Ferrite Bead, Rdc 0.3R, Z100MHZ 600R, Imax 1A, SMD 1206", DC Current Rating=1, DC Resistance Max=0.08, Ferrite Case Style="1206 ^3216 Metric]", Frequency Range="50MHz to 1", Impedance Tolerance="± 25%", Manufacturer=FAIR-RITE, Manufacturer Part Number=2512066017Y1, Supplier Part Number 1=1612060, Ferrite Mounting=SMD, Impedance=600, Manufacturer PN=2512066017Y1, Storage Location="PCB Assembly WS", Supplier="ECE Dept", Supplier 1=Farnell
Q2: library part TM_SSM3J328R, "MOSFET P-CH 20V 6A SOT23-3", Case/Package=SOT-23-3, Continuous Drain Current (ID)=6A, Drain to Source Breakdown Voltage=-20V, Drain to Source Resistance=47.4mR, Drain to Source Voltage (Vdss)=20V, Gate to Source Voltage (Vgs)=8V, Input Capacitance=840pF, Input Capacitance (Ciss) @ Vds="840pF @ 10V", Manufacturer=Toshiba, Max Operating Temperature=150°C, Max Power Dissipation=1W, Min Operating Temperature=-55°C, Package / Case="SOT-23-3 Flat Leads", Package Quantity=3000, Power Dissipation=2W, Supplier Device Package=SOT-23F, Supplier Part Number=SSM3J328RLFDKR-ND, ComponentLink1Description=https://datasheet.ciiva.com/11158/ssm3j328r-datasheet-en-20140301-11158652.pdf, ComponentLink1URL=https://datasheet.ciiva.com/11158/ssm3j328r-datasheet-en-20140301-11158652.pdf, Current - Continuous Drain (Id) @ 25° C=6A, Element Configuration=Single, FET Feature="Logic Level Gate, 1.5V Drive", FET Type="MOSFET P-Channel, Metal Oxide", Gate Charge (Qg) @ Vgs="12.8nC @ 4.5V", Manufacturer Part Number=SSM3J328R,LF, Mount="Surface Mount", Number of Channels=1, Number of Elements=1, Number of Pins=3, Packaging="Tape and Reel", Power - Max=1W, Pricing="1=0.79, 10=0.658, 25=0.5772, 100=0.4939, 250=0.42836, 500=0.36284, 1000=0.27972 (NZD)", Radiation Hardening=No, Rds On Max=29.8mR, Storage Location="PCB Assembly WS", Supplier=Digi-Key, Supplier 1=Digi-Key, Supplier Part Number 1=SSM3J328RLFDKR-ND, Turn-Off Delay Time=107ns, Turn-On Delay Time=32ns, Vgs(th) (Max) @ Id="1V @ 1mA"
R1 R2: library part RS_1K5, "RES 1.5K OHM 1/10W 5% 0603 SMD", Storage Location="PCB Assembly WS", Supplier="ECE Dept"
R3 R4: library part RS_2K2, "RES 2.2K OHM 1/10W 5% 0603 SMD", Storage Location="PCB Assembly WS", Supplier="ECE Dept"
R5: library part RS_10K, "RES 10.0K OHM 1/10W 5% 0603 SMD", Storage Location="PCB Assembly WS", Supplier="ECE Dept"
R6 R14: library part RS_100K, "RES 100K OHM 1/10W 5% 0603 SMD", Storage Location="PCB Assembly WS", Supplier="ECE Dept"
R7: library part RS_56K, "RES 56.0K OHM 1/10W 5% 0603 SMD", Storage Location="PCB Assembly WS", Supplier="ECE Dept"
R8 R9 R10 R11 R16: library part RS_0R0, "RES 0.0 OHM 1/10W 5% 0603 SMD", Storage Location="PCB Assembly WS", Supplier="ECE Dept"
R12 R13: library part RS_27R, "RES 27 OHM 1/10W 5% 0603 SMD", Storage Location="PCB Assembly WS", Supplier="ECE Dept"
R15 R18: library part RT_1R, "RES 1R OHM 1/4W 5% 1206 SMD", Storage Location="PCB Assembly WS", Supplier="ECE Dept"
R17: library part RS_1K, "RES 1.0K OHM 1/10W 5% 0603 SMD", Storage Location="PCB Assembly WS", Supplier="ECE Dept"
R19: library part RS_27K, "RES 27K OHM 1/10W 5% 0603 SMD", Storage Location="PCB Assembly WS", Supplier="ECE Dept"
R20: library part RS_47K, "RES 47.0K OHM 1/10W 5% 0603 SMD", Storage Location="PCB Assembly WS", Supplier="ECE Dept"
S3 S4: library part WS_EVQPNF05M, "Panasonic 6 x 3.5mm SMD Light Touch Switch Type SMD", Manufacturer=Panasonic, Supplier Part Number 1=2079481, Manufacturer PN=EVQPNF05M, PackageDescription="6.0 x 3.5 mm", Storage Location="PCB Assembly WS", Supplier="ECE Dept", Supplier 1=Farnell, Supplier 2=Digi-Key, Supplier Part Number 2=P13598SCT-ND
T1: library part TM_BSH105, "MOSFET N-CH 20V 1.05A SOT-23", Current - Continuous Drain (Id) @ 25° C=1.05A, Drain to Source Voltage (Vdss)=20V, Input Capacitance (Ciss) @ Vds="152pF @ 16V", Manufacturer="NXP Semiconductors", Package / Case="TO-236-3, SC-59, SOT-23-3", Power - Max=417mW, Supplier Part Number 1=1758066, FET Type="MOSFET N-Channel, Metal Oxide", Gate Charge (Qg) @ Vgs="3.9nC @ 4.5V", Manufacturer Part Number=BSH105,215, Pricing="1=0.53, 10=0.42, 25=0.3544, 100=0.2885, 250=0.23896, 500=0.1974, 1000=0.14785 (NZD)", Rds On (Max) @ Id, Vgs="200 mOhm @ 600mA, 4.5V", Storage Location="PCB Assembly WS", Supplier="ECE Dept", Supplier 1=Farnell, Supplier 2=Digi-Key, Supplier Part Number 2=568-6215-1-ND
U1: "9 axis IMU"
U2: "1.8V - 5V level converter"
U6: library part SE_ATSAM4S16BA-MU, "IC MCU 32BIT 512KB FLASH 64LQFP", Manufacturer=Atmel, Package / Case=64-LQFP, Supplier Part Number 1=ATSAM4S8BA-ANRCT-ND, Voltage - Supply (Vcc/Vdd)="1.62 V ~ 3.6 V", Code_JEDEC=MO-220VMMD-3, ComponentLink1Description="Manufacturer URL", ComponentLink1URL=http://www.atmel.com/, ComponentLink2Description="SAM4S Series Datasheet", ComponentLink2URL=http://www.atmel.com/dyn/resources/prod_documents/11100.pdf, ComponentLink3Description="SAM4S Series Summary", ComponentLink3URL=http://www.atmel.com/dyn/resources/prod_documents/11100S.pdf, Connectivity="I²C, IrDA, Memory Card, SPI, SSC, UART/USART, USB", Core Processor="ARM® Cortex®-M4", Core Size=32-Bit, Data Converters="A/D 11x12b, D/A 2x12b", Manufacturer Part Number=ATSAM4S8BA-ANR, Number of I/O=47, PackageDescription="64-Pin Quad Flat No-Lead (QFN) Sawn, 9 x 9 x 1.0 mm Body, 0.5 mm Pitch, Exposed Pad", PackageReference=64PS, PackageVersion="revJ, Jul-2007", Packaging="Cut Tape (CT)", Peripherals="Brown-out Detect/Reset, DMA, POR, PWM, WDT", Program Memory Size="512KB (512K x 8)", Program Memory Type=FLASH, RAM Size="128K x 8", Speed=120MHz, Supplier 1=Digi-Key
U7: library part ADP2302ARDZ-5.0-R7, "IC REG BUCK 5V 2A 8SOIC", Current - Output=2A, Frequency - Switching=700kHz, Supplier Part Number 1=ADP2302ARDZ-5.0-R7CT-ND, Voltage - Input (Max)=20V, Voltage - Output (Min/Fixed)=5V, Manufacturer_Part_Number=ADP2302ARDZ-5.0-R7, Output Type=Fixed, Supplier 1=Digi-Key, Type=DEV, Vendor="Analog Devices Inc"
U8: library part NRF24, "nRF24 SMD Module", Warning="No power planes near or under device"
U9 U10: library part SV_CAT6219-330TDGT3, "IC REG LIN 3.3V 500MA TSOT23-5", Base Part Number=CAT6219, Current - Output=500mA, Package / Case="SOT-23-5 Thin, TSOT-23-5", Supplier Device Package=TSOT-23-5, Supplier Part Number=CAT6219-330TDGT3CT-ND, Voltage - Input (Max)=5.5V, Voltage - Output (Min/Fixed)=3.3V, Voltage Dropout (Max)="0.5V @ 500mA", ComponentLink1Description=http://www.onsemi.com/pub/Collateral/CAT6219-D.PDF, ComponentLink1URL=http://www.onsemi.com/pub/Collateral/CAT6219-D.PDF, Manufacturer Part Number=CAT6219-330TDGT3, Supplier=Digi-Key, Supplier 1=Digi-Key
VR1: "JOYSTICK 10K OHM 2 AXIS TH", Manufacturer 1=SparkFun, Manufacturer Part Number 1=COM-09032, Supplier Part Number 1=1568-1526-ND, ComponentLink1Description=https://media.digikey.com/pdf/Data%20Sheets/Sparkfun%20PDFs/COM-09032_Web.pdf?src-supplier=Digi-Key, ComponentLink1URL=https://media.digikey.com/pdf/Data%20Sheets/Sparkfun%20PDFs/COM-09032_Web.pdf?src-supplier=Digi-Key, Pricing 1="1=3.95000 (USD)", RoHS=No, Stock 1=563, Supplier 1=Digi-Key
Y2: library part XT_CRYSTAL_12MHz_18pF, "CRYSTAL 12MHZ 18PF 6X3.5mm SMD", ESR (Equivalent Series Resistance)="60 Ohm", Frequency Stability=±50ppm, Frequency Tolerance=±30ppm, Load Capacitance=18pF, Manufacturer="CTS-Frequency Controls", Manufacturer Part Number=406C35D12M00000, Operating Mode=Fundamental, Operating Temperature="-20°C ~ 70°C", Package / Case="4-SMD, No Lead (DFN, LCC)", Supplier Part Number 1=CTX855CT-ND, Frequency=12MHz, Height="0.047\" (1.20mm)", Mounting Type="Surface Mount", Size / Dimension="0.236\" L x 0.138\" W (6.00mm x 3.50mm)", Supplier 1=Digi-Key

## Via types
v1: diameter 1, hole 0.5, Top Side to Bottom Side, 65 vias
v2: diameter 1.3, hole 1.1, Top Side to Bottom Side, 1 vias
v3: diameter 2, hole 1.5, Top Side to Bottom Side, 1 vias

## Nets (pads, with @x,y where several pads share a name; then routed paths per layer and width w, separated by ;. In a path a pad name is that pad's centre, name@x,y a point inside that pad or via, vN(x,y) a via of type N, cw(c..) or ccw(c..) an arc to the next point about the centre after c; other vN are vias at no path point)
3V3: 3V3_RST.1 3V3_TP.1 C1.2 C2.2 C29.2 C31.2 C33.2 C35.2 C37.2 DL3.2 DL4.2 H1.1 H2.1 H6.1 H9.7 H9.8 R1.2 R2.2 R11.2 R17.2 U1.1 U1.8 U1.13 U1.22 U2.1 U2.5 U6.1 U6.7 U6.18 U6.45 U6.58 VR1.1 VR1.4 | length 94.7
  Top Side w0.15: v1(37.2,37.5) 40.3,37.5 40.5,37.3 ; U6.58 40.55,60.75 40.9,60.4 C37.2 ; R1.2 39.2,36.7 39.8,36.7 R2.2 ; U1.22 42.818,35.16 41.14,35.16 40.8,35.5 40.8,37 40.5,37.3 ; U1.1 43.993,31.807 44.2,31.6 48.9,31.6 49.3,32 C2.2 ; U1.13 45.993,38.701 45.905,38.789 41.989,38.789 40.5,37.3 ; U1.8 47.146,34.732 48.668,34.732 48.9,34.5 48.9,33.7 49.1,33.5 C1.2
  Top Side w0.3: C29.2 24.05,63.25 U6.18 26.5,63.275 27.251,63.275 27.55,63.574 27.55,64.05 25.25,66.35 25.25,67.25 v1(25.2,67.3) ; U6.7 32.75,66.75 C35.2 ; C31.2 34.25,51.25 35.3,52.3 v1(35.3,52.4) ; U6.1 35.75,66.125 36.025,66.4 38.4,66.4 C33.2 38.8,65.3 v1(39.5,64.6) ; U6.58 36.75,60.75 36.3,61.2 36.3,64.3 37.95,65.95 C33.2@38.75,65.95 ; v1(49.3,30.6) 49.434,30.734 49.434,31.334 C2.2 ; R17.2 54.4,44.6 v1(56.9,44.6) 58.6,44.6 H2.1
  Top Side w0.4: R11.2 24.525,1.725 26.375,1.725 v1(26.4,1.7) ; v1(27,17.5) 3V3_TP.1 ; U2.5 30.325,10.575 31.034,10.575 31.734,9.875 32.475,9.875 U2.1 33.9,9.75 v1(34.8,10.65) ; C31.2@34.25,51.25 U6.45 ; DL4.2 DL3.2 38.9,45.9 v1(39,46) ; v1(37.2,37.5) 37.2,36.9 38.1,36 R1.2 ; C33.2@38.75,65.95 C33.2 ; 3V3_RST.1 v1(52.1,56.5) ; C2.2 C1.2
3V3_REG_IN: C41.2 C43.2 R10.2 U9.1 U9.3 U10.1 U10.3 | length 38.7
  Top Side w0.3: C41.2 17.2,3.2 17.75,3.75 18.35,3.75 U9.1 ; C43.2 38.3,10.1 U10.1
  Top Side w0.4: U9.3 19.3,2 19.7,2.4 19.7,3.5 19.3,3.9 U9.1@18.555,3.9 ; U9.1 U9.1@18.555,3.9 ; R10.2 22.555,10.1 23.655,9 ; C43.2 23.655,9 ; U10.1 39,11.575 39.425,12 40.5,12 40.9,11.6 U10.3 ; U9.1@18.555,3.9 23.655,9
3V3_RF: 3V3_RF_TP.1 R15.1 R16.2 | length 9.8
  Top Side w0.4: R16.2 40.25,17.75 R15.1 40.5,23.5 41,24 3V3_RF_TP.1
5V: 5V_TP.1 C27.2 C28.2 D1.1 H3.4 H7.3 L3.2 U2.6 U7.5 | length 72.8
  Top Side w0.4: v1(8.9,28.2) L3.2 12.3,27.5 C27.2 ; C28.2 C27.2 ; U7.5 14.395,27.405 C27.2 ; v1(18.9,17.1) D1.1 ; v1(27,27.5) 5V_TP.1 52.5,27.5 56.847,31.847 56.847,35.387 H3.4 ; v1(28.5,11.05) 28.5,10.45 29.2,9.75 U2.6 ; H7.3 28.58,4.52 28.58,6.48 v1(28.6,6.5)
  Bottom Side w0.4: v1(18.9,17.1) 21.7,14.3 25.3,14.3 28.55,11.05 28.55,6.55 v1(28.6,6.5)
BATT_DETECT: R6.1 R7.2 U6.52 | length 69.1
  Top Side w0.3: R7.2 R6.1 27.576,30.25 28.126,29.7 51.9,29.7 v1(54.7,32.5) ; v1(35.3,58.3) 35.489,58.3 36.039,57.75 U6.52
  Bottom Side w0.3: v1(35.3,58.3) 54.7,38.9 v1(54.7,32.5)
BUTTON: S4.1 U6.44 | length 72.2
  Top Side w0.3: v1(17.1,48.4) 18.8,46.7 37.424,46.7 37.8,47.076 37.8,53.676 35.776,55.7 34,55.7 33.775,55.475 U6.44@33.775,55.1 ; v1(19.5,78.8) 21.55,78.8 S4.1
  Bottom Side w0.3: v1(17.1,48.4) 16.2,49.3 16.2,75.5 v1(19.5,78.8)
BUZ: T1.1 U6.37 | length 33
  Top Side w0.3: v1(28.9,57.6) 30.25,56.25 U6.37 ; v1(52.1,50.9) 52.1,50.711 52.5,50.311 T1.1
  Bottom Side w0.3: v1(28.9,57.6) 29.96,57.6 30.26,57.3 32.768,57.3 34.784,59.316 37.496,59.316 45.912,50.9 v1(52.1,50.9)
D_N: H8.2 R13.1 | length 3.1
  Top Side w0.381: H8.2 5.7,18.05 6.15,18.5 R13.1 6.75,18.4 R13.1@6.591,18.24
D_P: H8.3 R12.1 | length 2.7
  Top Side w0.381: H8.3 5.75,17.4 6.15,17 R12.1
DRes_N: R13.2 U6.56
DRes_P: R12.2 U6.57
GND: C1.1 C2.1 C3.2 C4.1 C23.1 C25.1 C27.1 C28.1 C29.1 C30.2 C31.1 C32.2 C33.1 C34.2 C35.1 C36.2 C37.1 C38.1 C39.1 C41.1 C42.1 C43.1 C44.1 D3.1 GND_TP_1.1 GND_TP_2.1 GND_TP_3.1 H1.10 H3.3 H5.1 H5.3 H6.10 H7.1 H8.5 H8.6 H9.5 H9.6 J1.1 J2.1 Q2.1 R5.1 R7.1 R18.1 R20.1 S3.2 S4.2 T1.2 U1.9 U1.11 U1.18 U1.20 U2.2 U6.2 U6.17 U6.46 U6.60 U7.7 U7.EPAD U8.2 U9.2 U10.2 VR1.3 VR1.6 VR1.8 | length 26.6
  Top Side w0.3: C41.1 17.65,2.95 U9.2 ; C29.1 23.066,65.366 23.866,65.366 v1(24,65.5) 24,64.5 24.75,63.75 U6.17 ; R5.1 C31.1 ; H7.1 33.7,4.56 v1(33.7,6.5) ; U6.60 42.85,61.75 v1(43.9,60.7) ; C34.2 C37.1 42,57.8 41.594,57.394 41.594,56.537 v1(41.5,56.444) ; C2.1 C1.1 C3.2
  other v3: 19,25.5
GPIO_0: H6.2 U6.6 | length 42.3
  Top Side w0.3: v1(33.166,63.666) 33.25,63.75 U6.6
  Bottom Side w0.3: v1(33.166,63.666) 34.1,64.6 35.718,64.6 38.418,67.3 59.832,67.3 60.625,66.506 60.625,57.005 H6.2
GPIO_1: H6.3 U6.38 | length 35
  Top Side w0.3: U6.38 30.8,54.525 v1(30.8,58.1)
  Bottom Side w0.3: v1(30.8,58.1) 32.931,58.1 35.3,60.469 35.3,60.5 35.6,60.8 42.869,60.8 43.569,61.5 47.809,61.5 48.259,61.05 52.5,61.05 53.686,59.864 58.056,59.864 H6.3
GPIO_2: H6.4 U6.26 | length 34.6
  Top Side w0.3: U6.26 32.65,59.25 33.9,60.5 v1(34,60.5)
  Bottom Side w0.3: v1(34,60.5) 34.9,61.4 42.832,61.4 43.382,61.95 55.65,61.95 56.64,60.96 H6.4
GPIO_3: H6.5 U6.25 | length 34.6
  Top Side w0.3: U6.25 31.75,59.75 v1(32.6,60.6)
  Bottom Side w0.3: v1(32.6,60.6) 33.85,61.85 42.646,61.85 43.196,62.4 56.496,62.4 57.596,63.5 H6.5
GPIO_4: H6.6 U6.23 | length 35.2
  Top Side w0.3: U6.23 29.75,60.75 v1(30.6,61.6)
  Bottom Side w0.3: v1(30.6,61.6) 32.469,61.6 33.169,62.3 42.459,62.3 43.009,62.85 56.31,62.85 H6.6
GPIO_5: H6.7 U6.15 | length 49.5
  Top Side w0.3: U6.15 28.725,65.55 28.725,67.375 28.35,67.75 28.35,70.914 33.836,76.4 57.6,76.4 58.462,77.262 59.94,77.262 61.012,76.19 61.012,71.13 59.674,69.792 59.674,68.754 H6.7
GPIO_6: H6.8 U6.14 | length 43.6
  Top Side w0.3: U6.14 29.25,67.55 28.8,68 28.8,70.727 34.023,75.95 57.35,75.95 58.387,74.913 59.887,74.913 60.562,74.238 60.562,73.22 59.674,72.332 59.674,71.294 H6.8
GPIO_7: H6.9 U6.11 | length 37.3
  Top Side w0.3: U6.11 30.75,71.75 34.5,75.5 57.164,75.5 58.201,74.463 58.589,74.463 59.392,73.66 H6.9
GPIO_8: H1.2 U6.16 | length 17.4
  Top Side w0.3: v1(27.2,66.9) 27.334,66.766 28.034,66.766 28.225,66.575 28.225,65.55 U6.16
  Bottom Side w0.3: v1(27.2,66.9) 27.2,71 31.04,74.84 H1.2
GPIO_9: H1.3 U6.13 | length 22.4
  Top Side w0.3: v1(29,63.7) 29.75,64.45 U6.13
  Bottom Side w0.3: v1(29,63.7) 29.5,63.7 30.38,64.58 32.48,64.58 33.6,65.7 33.6,80.48 H1.3
GPIO_10: H1.4 U6.19 | length 24.5
  Top Side w0.3: U6.19 27.75,62.75 28,63 28,64.5 26.4,66.1 26.4,69.6 33.65,76.85 34.85,76.85 36.12,78.12 H1.4
GPIO_11: H1.5 U6.29 | length 38.8
  Top Side w0.3: U6.29 21.759,57.75 20.9,58.609 20.9,61.6 20.9,64.764 34.705,78.569 34.705,81.205 35.125,81.625 37.534,81.625 H1.5
GPIO_12: H1.6 U6.30 | length 43.9
  Top Side w0.3: U6.30 21.623,57.25 20.45,58.423 20.45,61.414 20.45,64.95 32.454,76.954 32.454,80.966 33.564,82.075 39.625,82.075 H1.6
GPIO_13: H1.7 U6.31 | length 49.4
  Top Side w0.3: U6.31 26.425,56.8 21.436,56.8 20,58.236 20,65.136 29.914,75.051 29.914,80.966 31.474,82.525 41.975,82.525 43.506,80.994 43.506,80.734 H1.7
GPIO_14: H1.8 U6.32 | length 54.9
  Top Side w0.3: U6.32 21.35,56.25 19.55,58.05 19.55,65.323 27,72.773 27,81.075 28.925,83 43.78,83 H1.8
GPIO_15: H1.9 U6.34 | length 62.5
  Top Side w0.3: U6.34 28.75,55.51 28.46,55.8 21.156,55.8 19.1,57.856 19.1,65.509 26.55,72.959 26.55,81.262 28.738,83.45 45.87,83.45 H1.9
IMU_SCL: R2.1 U1.23 U6.36 | length 28.1
  Top Side w0.15: R2.1 40.265,34.735 U1.23
  Top Side w0.3: v1(29.7,51.2) 29.75,51.25 U6.36 ; v1(35.1,40.8) 36,39.9 36,36.6 37.25,35.35 38.95,35.35 39.3,35 R2.1
  Bottom Side w0.3: v1(29.7,51.2) 31.9,49 31.9,44.3 35.1,41.1 v1(35.1,40.8)
IMU_SDA: R1.1 U1.24 U6.43 | length 29.2
  Top Side w0.15: R1.1 38.665,34.335 U1.24
  Top Side w0.3: v1(33.2,52.4) 33.25,52.45 U6.43 ; v1(34.9,37.6) 34.9,37.064 37.464,34.5 R1.1
  Bottom Side w0.3: v1(33.2,52.4) 33.2,47.605 37.4,43.405 37.4,40.1 v1(34.9,37.6)
JOYSTICK_1: U6.10 VR1.2 | length 41.4
  Top Side w0.3: U6.10 31.25,70.65 v1(32.2,71.6)
  Bottom Side w0.3: VR1.2 11.85,82.1 31.032,82.1 32.2,80.932 v1(32.2,71.6)
JOYSTICK_2: U6.9 VR1.5 | length 19.1
  Top Side w0.3: v1(31.4,63.6) 31.4,63.789 31.75,64.139 U6.9
  Bottom Side w0.3: VR1.5 21.05,69.75 27.9,62.9 29.336,62.9 30.036,63.6 v1(31.4,63.6)
JOYSTICK_BUTTON: U6.42 VR1.7 | length 27.3
  Top Side w0.3: VR1.7 21.42,54.9 v1(27.2,54.9) ; U6.42 32.75,55.51 v1(32.75,56.35)
  Bottom Side w0.3: v1(27.2,54.9) 27.7,54.9 29.15,56.35 v1(32.75,56.35)
LED_DIN: U2.3 U6.3 | length 93.3
  Top Side w0.3: U2.3 v1(32.6,13.2) ; U6.3 34.75,63.55 v1(34.8,63.5)
  Bottom Side w0.3: 31.069,62.8 30.069,62.8 29.6,62.331 29.6,59.431 25.95,55.781 25.95,54.45 26.8,53.6 37.5,53.6 38.5,52.6 38.5,48.2 42.7,44 42.7,33.4 45.3,30.8 45.3,9.6 43.7,8 39.445,8 34.245,13.2 v1(32.6,13.2) ; 31.069,62.8 34.1,62.8 v1(34.8,63.5)
LED_STRIP: H7.2 U2.4 | length 10.7
  Top Side w0.3: U2.4 v1(30.2,13.5) ; H7.2 v1(31.1,6.5)
  Bottom Side w0.3: 30.2,13 31.1,12.1 v1(31.1,6.5)
NetC3_1: C3.1 U1.10 | length 3.2
  Top Side w0.15: U1.10 48.665,35.535 49.2,35 C3.1
NetC23_2: C23.2 U6.62 Y2.1 | length 11.5
  Top Side w0.3: U6.62 44.25,62.75 Y2.1 46.3,60.3 C23.2
NetC25_2: C25.2 U6.61 Y2.3 | length 21.8
  Top Side w0.3: U6.61 44.05,62.25 44.9,61.4 44.9,58.636 45.286,58.25 48.224,58.25 49.061,59.087 49.061,61.061 Y2.3 C25.2
NetC26_1: C26.1 U7.1 | length 3
  Top Side w0.3: C26.1 19.6,23.2 19.995,23.595 U7.1
NetC26_2: C26.2 D3.2 L3.1 U7.8 | length 23
  Top Side w0.3: L3.1 10.8,19.8 D3.2 14.5,19.8 16.8,22.1 C26.2 18.2,23.2 17.8,23.6 16.694,23.6 U7.8
NetC30_1: C30.1 C32.1 C34.1 C36.1 L4.2 U6.8 U6.12 U6.24 U6.54 | length 45.1
  Top Side w0.3: C30.1 23.65,60 23.9,60.25 U6.24 30.85,60.25 32,61.4 33.7,61.4 ; C36.1@30,68.6 29.8,68.4 29.8,67.2 30.25,66.75 U6.12 30.25,63.281 31.2,62.331 31.781,62.331 32.275,62.825 ; L4.2@35.9,68.6 L4.2 36,70.4 35.6,70.8 32.3,70.8 31.8,70.3 31.8,69 32.3,68.5 C32.1 32.8,67.5 32.25,66.95 U6.8 32.275,65.5 32.275,62.825 ; C34.1 39.35,58.75 U6.54 36.75,58.75 35.65,59.85 35.65,60.25 34.5,61.4 33.7,61.4 ; 32.275,62.825 33.7,61.4
NetC38_2: C38.2 R15.2 U8.1 | length 5.5
  Top Side w0.3: R15.2 43.927,18.727 ; C38.2 44.2,19 43.927,18.727 ; U8.1 44.5,18.586 44.359,18.727 43.927,18.727
NetC39_2: C39.2 C40.2 L4.1 U6.64 | length 10.5
  Top Side w0.3: U6.64 41.45,63.75 C40.2 41.7,66.6 C39.2 39.35,68 39,68.35 L4.1
NetC40_1: C40.1 R18.2 | length 3.9
  Top Side w0.3: C40.1 45.8,66.5 R18.2
NetC42_2: C42.2 R11.1 U9.5 | length 3.6
  Top Side w0.3: U9.5 22.3,3.9 C42.2 23.05,3.25 R11.1
NetC44_2: C44.2 R16.1 U10.5 | length 2.9
  Top Side w0.3: U10.5 39,14.8 C44.2 39,15.2 R16.1
NetD1_2: D1.2 D2.2 R10.1 | length 29.7
  Top Side w0.3: R10.1@17.75,10 R10.1 17.75,11.775 D1.2 19.875,12.925 v1(21.4,11.4) ; v1(36.1,2.4) 37.7,4 D2.2
  Bottom Side w0.3: v1(21.4,11.4) 21.4,8.5 27.5,2.4 v1(36.1,2.4)
NetDL3_1: DL3.1 R3.1 | length 2
  Top Side w0.3: DL3.1 R3.1
NetDL4_1: DL4.1 R4.1 | length 2
  Top Side w0.3: DL4.1 R4.1
NetF2_1: F2.1 H5.2 | length 3.2
  Top Side w0.6: H5.2 14.01,5.66 F2.1
NetF2_2: F2.2 Q2.3 R8.1 | length 19.5
  Top Side w0.6: R8.1 9.5,14.25 9.5,11.2 10.1,10.6 15.7,10.6 18,8.3 18.6,8.3 18.95,7.95 F2.2 20.7,7.7 Q2.3
NetH2_2: H2.2 R17.1 T1.3 | length 7.6
  Top Side w0.3: R17.1 T1.3 55.25,48.45 55.66,48.04 H2.2
NetJ1_2: J1.2 U6.5 | length 10.4
  Top Side w0.3: U6.5 33.75,66.75 34.3,67.3 36.624,67.3 36.8,67.476 36.8,70.3 37.5,71 J1.2@39.5,71
NetJ2_2: J2.2 U6.4 | length 13.5
  Top Side w0.3: U6.4 34.275,65.55 34.275,66.589 34.536,66.85 36.811,66.85 37.25,67.289 37.25,70.114 37.586,70.45 40.405,70.45 41.455,71.5 J2.2
NetQ2_2: Q2.2 R9.1 | length 1.9
  Top Side w0.6: Q2.2 25.55,9.95 25.7,10.1 25.75,10.05 R9.1
NetR14_1: R14.1 U7.4 | length 14.3
  Top Side w0.3: U7.4 21.406,27.5 21.606,27.3 21.706,27.4 v1(23,27.4) ; R14.1 v1(23,17)
  Bottom Side w0.3: v1(23,17) v1(23,27.4)
NetRST_1: RST.1 U6.55 | length 9.2
  Top Side w0.15: U6.55 39.582,59.25 40.032,59.7 42.5,59.7 44.5,57.7 RST.1
nRST: H9.1 S3.1 U6.39 | length 67.6
  Top Side w0.3: H9.1 5.7,39.12 3.68,39.12 3.1,39.7 3.1,52 4.9,53.8 7.6,53.8 11.4,50 30.3,50 31.25,50.95 U6.39 31.25,56.624 32.026,57.4 34.8,57.4 40.45,51.75 S3.1
RADIO_CSN: U6.28 U8.4 | length 60.9
  Top Side w0.3: v1(23.1,58.7) 24.14,58.7 24.59,58.25 U6.28 ; v1(43.2,14.5) 45.729,14.5 U8.4
  Bottom Side w0.3: v1(23.1,58.7) 23.1,44.9 38,30 38,16.5 40,14.5 v1(43.2,14.5)
RADIO_ENABLE: R5.2 U6.41 U8.3 | length 47.7
  Top Side w0.3: v1(30.5,49.1) R5.2 32.25,51.35 U6.41 ; v1(42.6,16.1) 42.657,16.043 U8.3
  Bottom Side w0.3: v1(30.5,49.1) 30.5,40.5 40.5,30.5 40.5,18.2 v1(42.6,16.1)
RADIO_IRQ: U6.20 U8.8 | length 75
  Top Side w0.3: v1(24.037,62.363) 24.125,62.275 26.45,62.275 U6.20 ; v1(43.7,9.7) 43.714,9.686 U8.8
  Bottom Side w0.3: v1(24.037,62.363) 23.4,63 21,63 19,61 19,43.3 34.1,28.2 34.1,14.9 39.3,9.7 v1(43.7,9.7)
RADIO_MISO: U6.27 U8.7 | length 72.8
  Top Side w0.3: v1(24.8,59.3) 24.989,59.3 25.514,58.775 26.45,58.775 U6.27 ; v1(42.6,10.9) 42.657,10.957 U8.7
  Bottom Side w0.3: v1(24.8,59.3) 24.75,59.35 24.75,60.25 22.632,62.368 21.932,62.368 20.35,60.786 20.35,43.914 20.6,43.664 20.6,43.4 35.5,28.5 35.5,15.5 40.1,10.9 v1(42.6,10.9)
RADIO_MOSI: U6.22 U8.6 | length 66.6
  Top Side w0.3: U6.22 28.15,61.25 28.15,61.26 28.7,61.81 v1(28.7,62) ; v1(43.7,12.2) 43.729,12.229 U8.6
  Bottom Side w0.3: v1(28.7,62) 28.7,60.3 24.5,56.1 24.5,45 39.5,30 39.5,17 41.2,15.3 43.7,15.3 44.5,14.5 44.5,13.189 43.7,12.389 v1(43.7,12.2)
RADIO_SCK: U6.21 U8.5 | length 66.6
  Top Side w0.3: v1(22.4,61.3) 24.631,61.3 25.081,61.75 U6.21 ; v1(42.1,13.5) U8.5
  Bottom Side w0.3: v1(22.4,61.3) 21.5,60.4 21.5,44.5 36.8,29.2 36.8,15.9 39.2,13.5 v1(42.1,13.5)
SPK_0: H3.1 U6.63 | length 63.3
  Top Side w0.3: U6.63 37.575,63.2 44.1,63.2 45.3,64.4 53.8,64.4 54.9,63.3 54.9,57 51.05,53.15 51.05,46.726 55.076,42.7 61.124,42.7 62.2,41.624 62.2,31.1 61.52,30.42 H3.1
SPK_1: H3.2 U6.59 | length 47.4
  Top Side w0.3: U6.59 42.65,61.25 42.9,61 42.9,60 45.1,57.8 46.374,57.8 46.7,57.474 46.7,55.3 50.5,51.5 50.5,46.639 54.889,42.25 60.938,42.25 61.7,41.488 61.7,33.6 61.06,32.96 H3.2
STATUS0: R3.2 U6.48 | length 4.6
  Top Side w0.3: U6.48 36.365,54.475 37.35,53.49 37.35,51.35 R3.2
STATUS1: R4.2 U6.47 | length 6.4
  Top Side w0.3: U6.47 35.25,53.378 35.325,53.303 36.9,53.303 36.9,51.65 36.426,51.65 36.25,51.474 36.25,51 R4.2
SWCLK: H9.2 U6.53 | length 63.6
  Top Side w0.3: H9.2 6.14,42.1 37.836,42.1 42.636,46.9 46.536,46.9 47.55,47.914 47.55,52.586 46.486,53.65 41.386,53.65 39.3,55.736 39.3,57.5 38.575,58.225 37.55,58.225 U6.53
SWDIO: H9.4 U6.51 | length 62.5
  Top Side w0.3: H9.4 6.085,44.585 8.11,44.585 10.145,42.55 37.65,42.55 42.5,47.4 46.4,47.4 47.1,48.1 47.1,52.4 46.3,53.2 41.2,53.2 38.85,55.55 38.85,56.964 38.589,57.225 37.55,57.225 U6.51
USB_DETECT: R19.1 R20.2 U6.35 USB_DETECT_TP1.1 | length 32
  Top Side w0.3: R19.1 R20.2 23.276,31.5 23.926,32.15 25.65,32.15 27.5,34 USB_DETECT_TP1.1 30,35.25 29.6,35.65 v1(29.6,41.3) ; v1(28.1,51.3) 28.1,52.29 29.25,53.44 U6.35
  Bottom Side w0.3: v1(28.1,51.3) 28.1,42.8 v1(29.6,41.3)
V_BAT: C4.2 H3.5 R6.2 R9.2 R14.2 U7.2 U7.3 V_BATT_TP1.1 | length 82.7
  Top Side w0.6: U7.2 24.735,24.865 25.6,24 ; R14.2 23.05,13.45 24.05,13.45 24.6,12.9 ; R6.2 25.2,28.75 25.55,29.1 v1(27,29.1) 53,29.1 56.197,32.297 56.197,37.277 H3.5 ; R9.2 27.25,11.25 26.5,12 C4.2 24.6,12.9 ; v1(33.3,24) V_BATT_TP1.1 25.6,24 ; 24.6,12.9 24.6,23 25.6,24
  Bottom Side w0.5: v1(27,29.1) 29.3,29.1 33.3,25.1 v1(33.3,24)
VBUS: D2.1 H8.1 R8.2 R19.2 VBUS_TP1.1 | length 97.2
  Top Side w0.4: R8.2 6.7,15.45 6.7,14.3 5.8,13.4 3.7,13.4 2.8,14.3 2.8,18.3 3.2,18.7 H8.1 5.4,18.7 5.9,19.2 5.9,21.4 1.05,26.25 1.005,26.25 0.8,26.455 0.8,30 1.4,30.6 15.825,30.6 17.675,28.75 R19.2 23.05,28.75 26.1,25.7 34.5,25.7 35.4,24.8 35.4,21.8 34.1,20.5 32.5,20.5 ; VBUS_TP1.1 32.5,20.5 ; D2.1 42.8,4 41.55,5.25 41.55,11.75 40.675,12.625 38.475,12.625 37,14.1 37,16 32.5,20.5
pads on no net: H8.4 H9.3 H9.9 H9.10 U1.2 U1.3 U1.4 U1.5 U1.6 U1.7 U1.12 U1.14 U1.15 U1.16 U1.17 U1.19 U1.21 U6.33 U6.40 U6.49 U6.50 U7.6 U9.4 U10.4 VR1.9 VR1.10 VR1.11 VR1.12 VR1.13 VR1.14 Y2.2 Y2.4
copper on no net:
  other v2: 44.993,35.335

## Polygon pours and split planes (outlines as drawn)
GND on Ground Plane (split plane): 0.51,84.36 63.436,84.36 63.49,84.306 63.49,21.729 45.3,21.729 45.25,21.72 45.208,21.692 45.18,21.65 45.171,21.6 45.171,7.5 45.18,7.45 45.208,7.408 45.25,7.38 45.3,7.371 45.35,7.38 45.392,7.408 45.42,7.45 45.429,7.5 45.429,21.471 63.49,21.471 63.49,7.63 55.5,7.63 55.45,7.62 55.408,7.592 55.38,7.55 55.37,7.5 55.38,7.45 55.408,7.408 55.45,7.38 55.5,7.371 63.49,7.371 63.49,0.51 0.51,0.51 0.51,84.36
5V on Power Plane (split plane): 33.971,28.454 20.446,14.929 6.929,14.929 6.929,32.971 33.971,32.971
3V3 on Power Plane (split plane): 63.49,21.729 45.3,21.729 45.25,21.72 45.208,21.692 45.18,21.65 45.171,21.6 45.171,7.5 45.18,7.45 45.208,7.408 45.25,7.38 45.3,7.371 45.35,7.38 45.392,7.408 45.42,7.45 45.429,7.5 45.429,21.471 63.49,21.471 63.49,0.51 0.51,0.51 0.51,84.49 63.49,84.49

## Other copper
Top Side:
  region: 42,60.4
  region net 5V: 18.9,17.1
  text "Wacky Hat" at 55,-4.6 h0.8
Ground Plane (plane layer: these items are gaps in the copper):
  region: 0,85
  lines w0.254: 0.51,84.49 63.49,84.49 64,83.979 ; 45.3,7.5 45.3,21.6 63.9,21.6 ; 55.5,7.5 64,7.5 ; 63.9,17.4 63.9,20.8 64,20.7 64,7.5 ; 0,85 64,85 ; 0,85 64,85 ; 0,85 0,0 64,0 64,85 ; 0,85 64,85 ; 64,7.5 64,20.9 64,7.5
Power Plane (plane layer: these items are gaps in the copper):
  lines w0.254: 45.3,7.5 45.3,21.6 64,21.6 ; 6.8,14.8 20.5,14.8 34.1,28.4 34.1,33.1 6.8,33.1 6.8,14.8

## Silkscreen, mask and mechanical layers (free items; w line width, h text height)
Board Outline:
  the board outline again, w0.254

## Dimensions
64,86 to 0,86 on Mechanical 1
65,85 to 65,0 on Mechanical 1

## Text inside footprints (layer, text, board x,y; h text height)
H1: Top Overlay "1" at 29.135,76.055 h0.8 r90
H2: Top Overlay "1" at 63.627,45.914 h1.52 r180
H3: Top Overlay "1" at 63.945,31.055 h0.8 r180
H6: Top Overlay "1" at 63.945,53.975 h0.8 r180
H7: Top Overlay "1" at 33.7,9.3 h0.8 r270
H8: Mechanical 1 "PCB Edge" at -0.77,19.55 h0.8 r270
H9: Top Overlay "2" at 5.71,38.72 h0.8 r90; Top Overlay "1" at 8.25,39.22 h0.8 r90; Top Overlay "10" at 5.71,52.28 h0.8 r90; Top Overlay "9" at 8.25,52.28 h0.8 r90
U7: Mechanical 13 "*" at 20.93,24.344 h0.8 r180
U8: Top Overlay "NO GND/ / POWER / PLANES / UNDER / OR NEARBY" at 51.275,18.486 h0.8 r270